# EAGLE board eib-64-large_panel (EAGLE 8.3.2), part 1 of 3
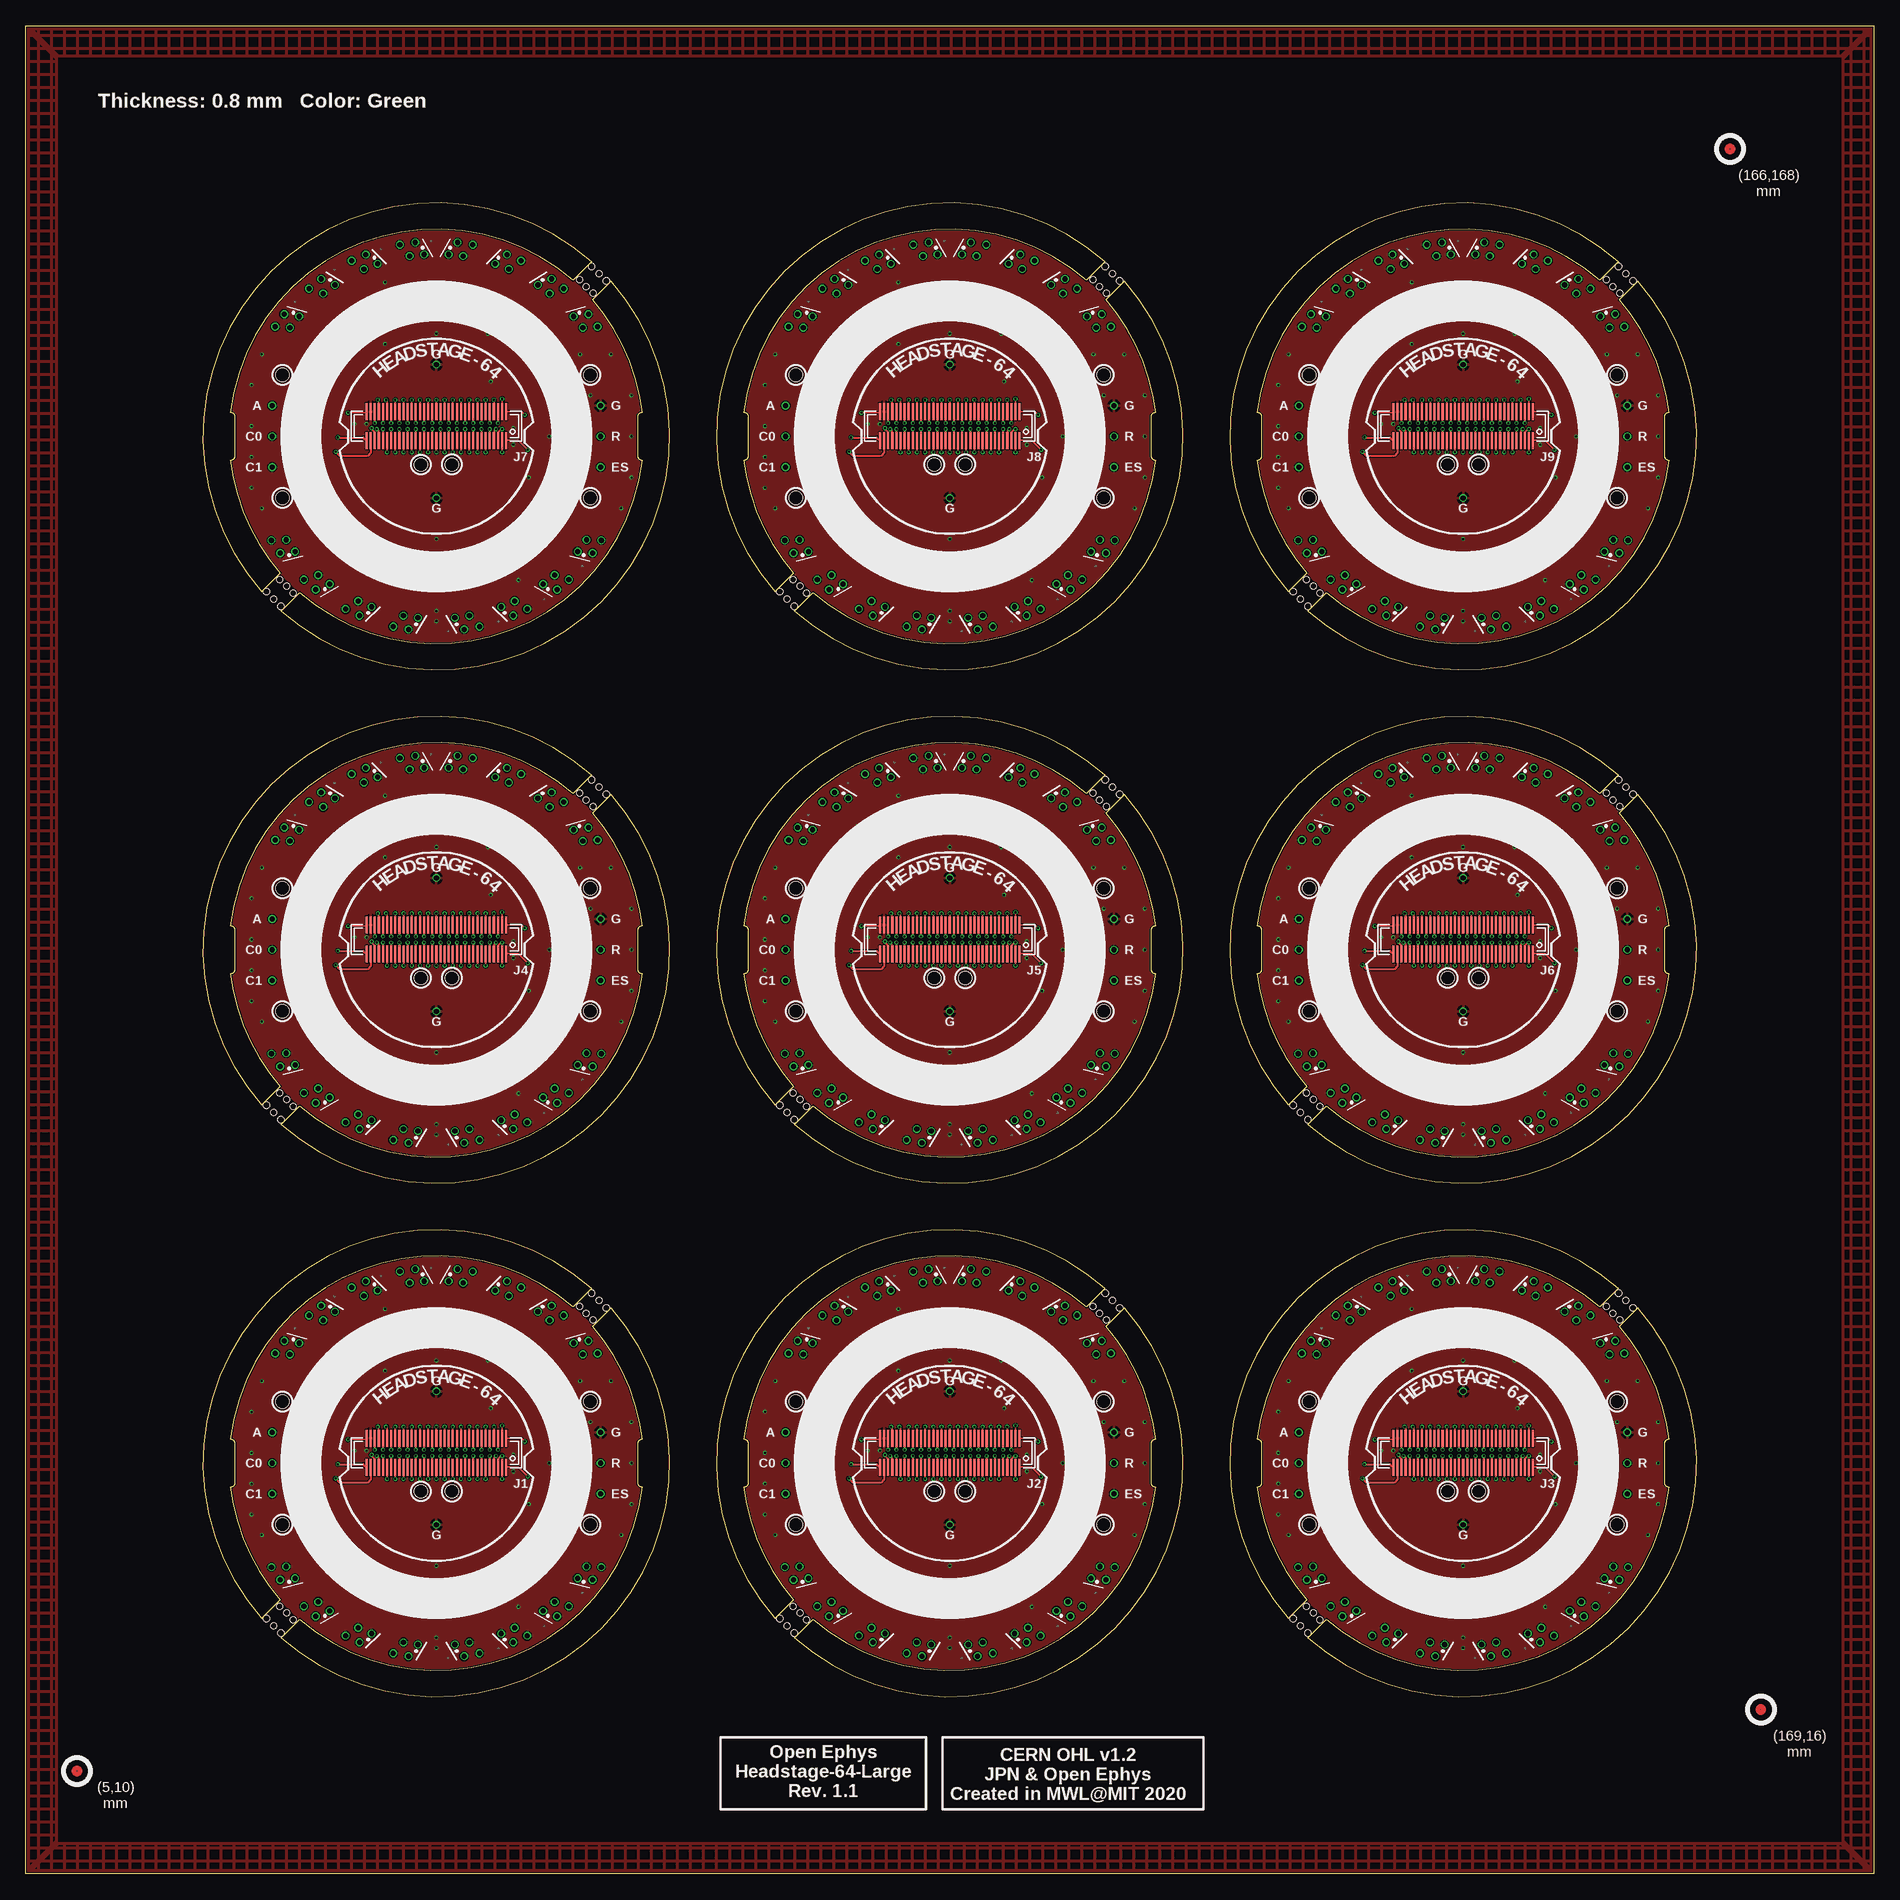
[diagram p0: board, top side]
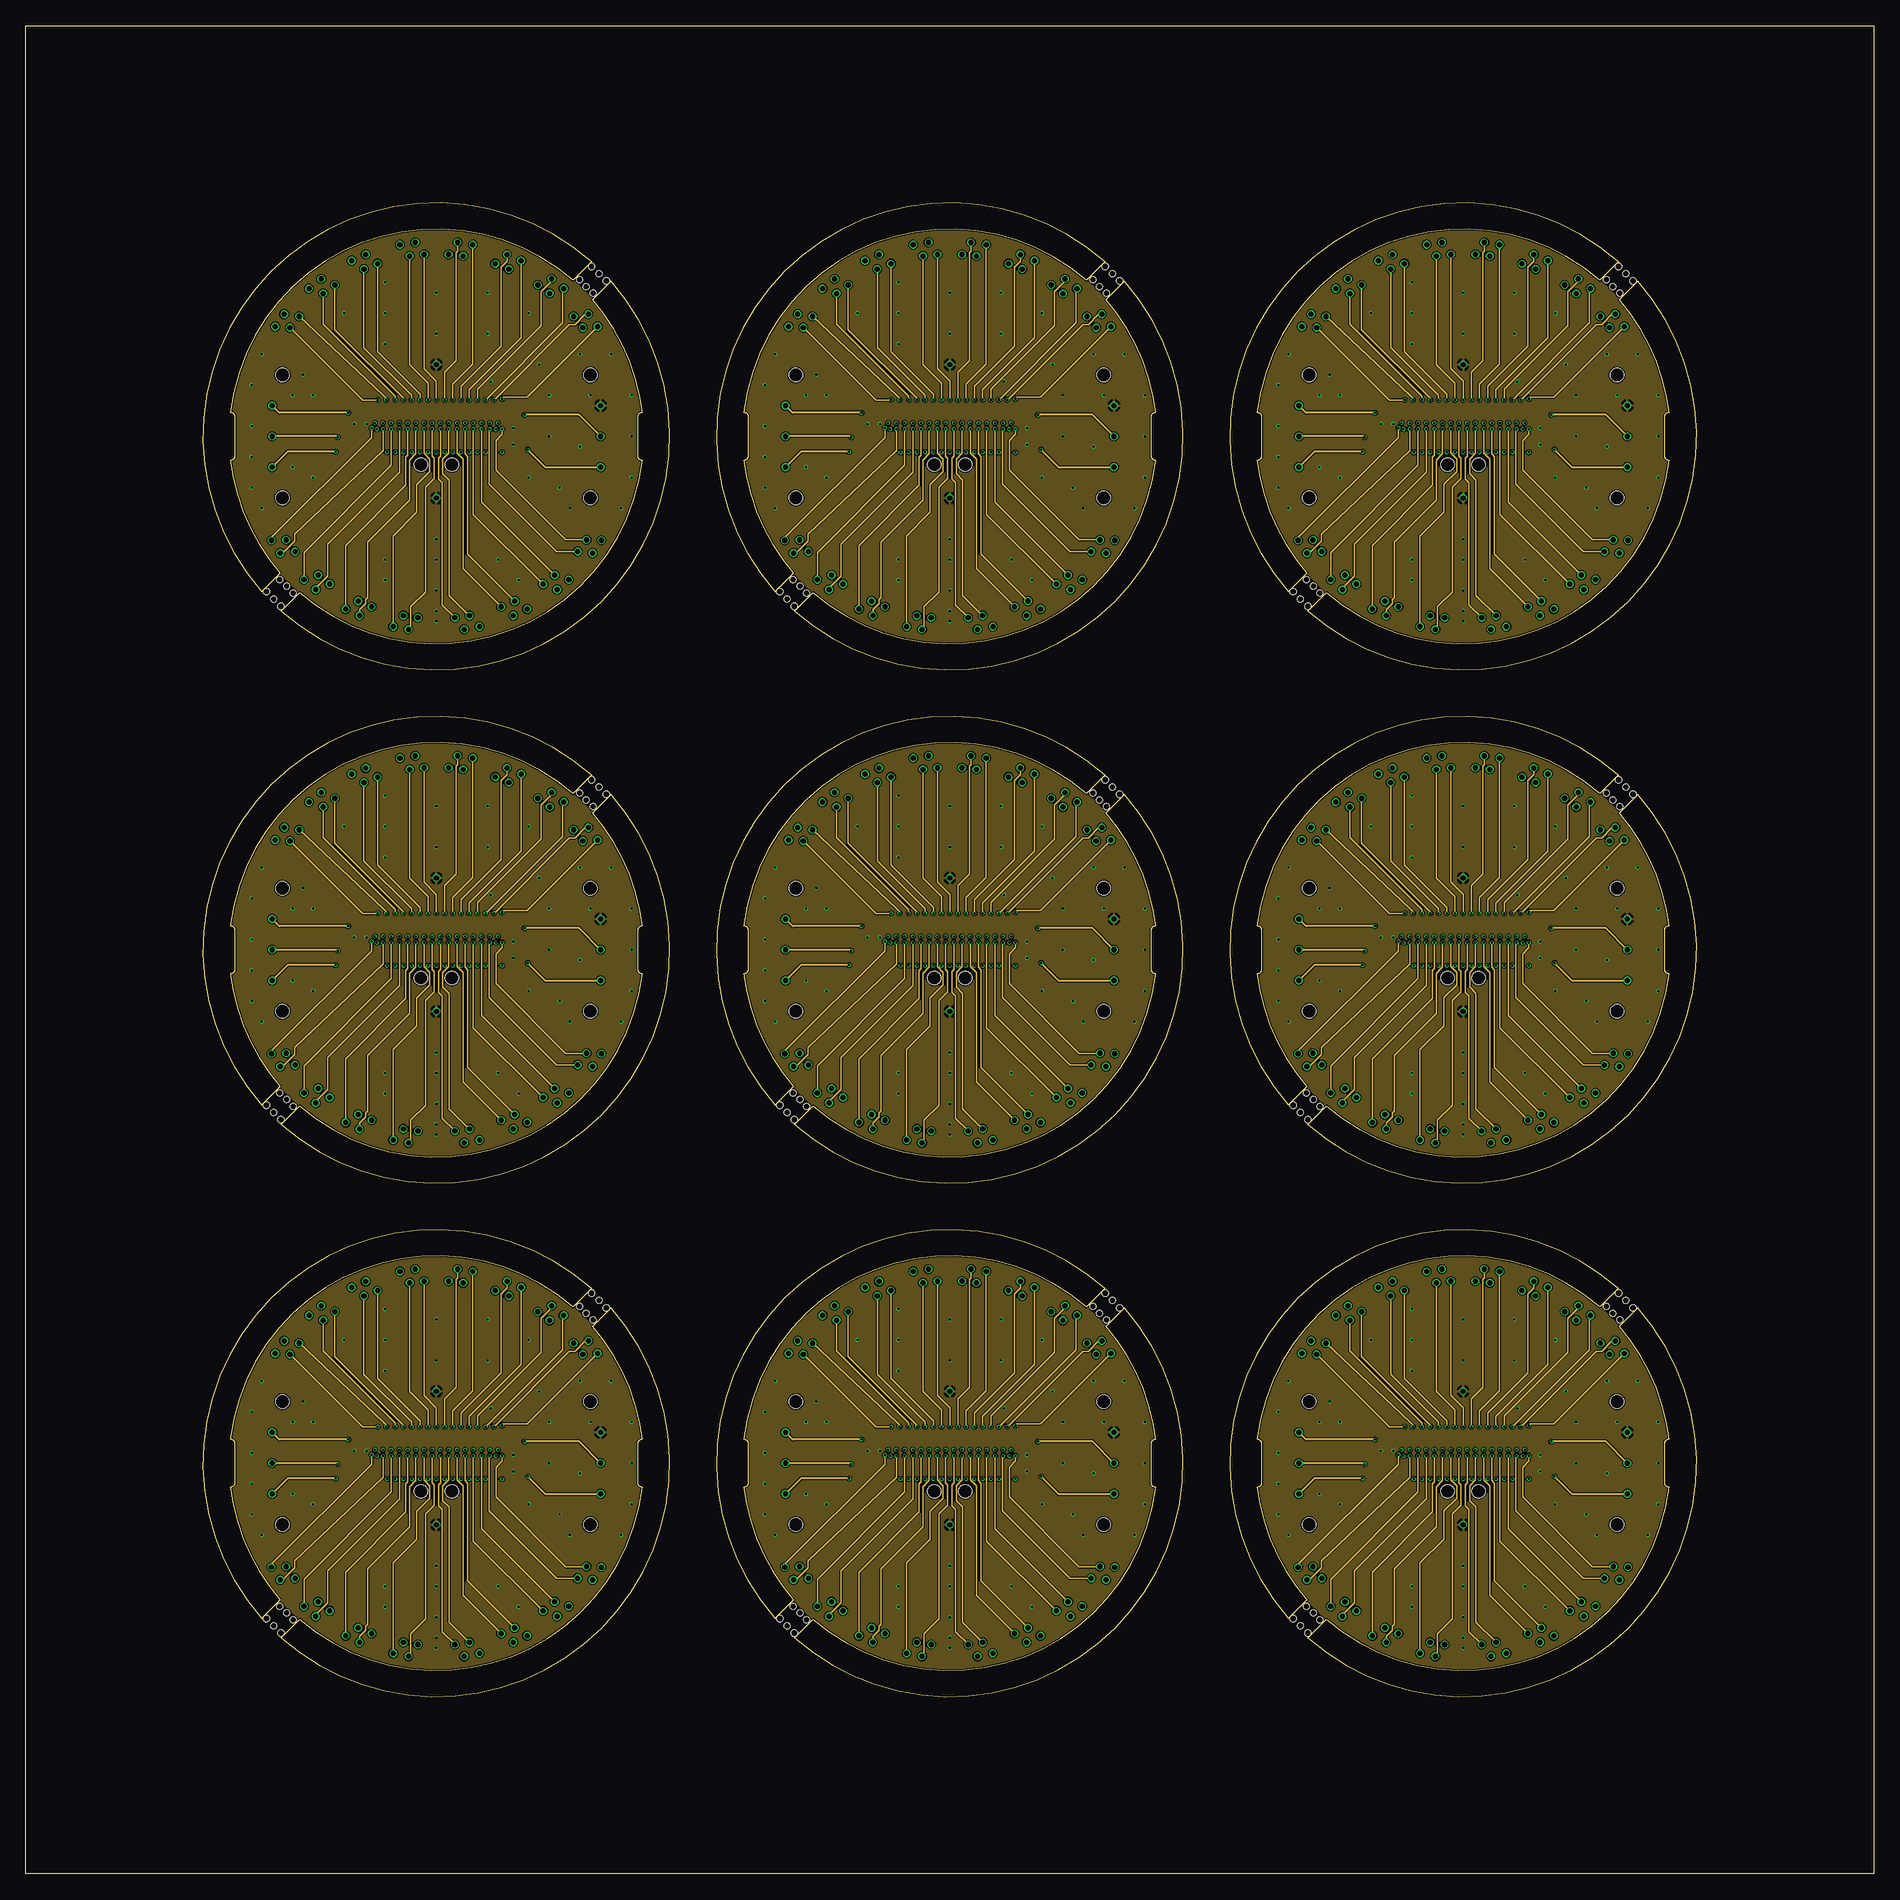
[diagram p1: board, inner layer Route2]
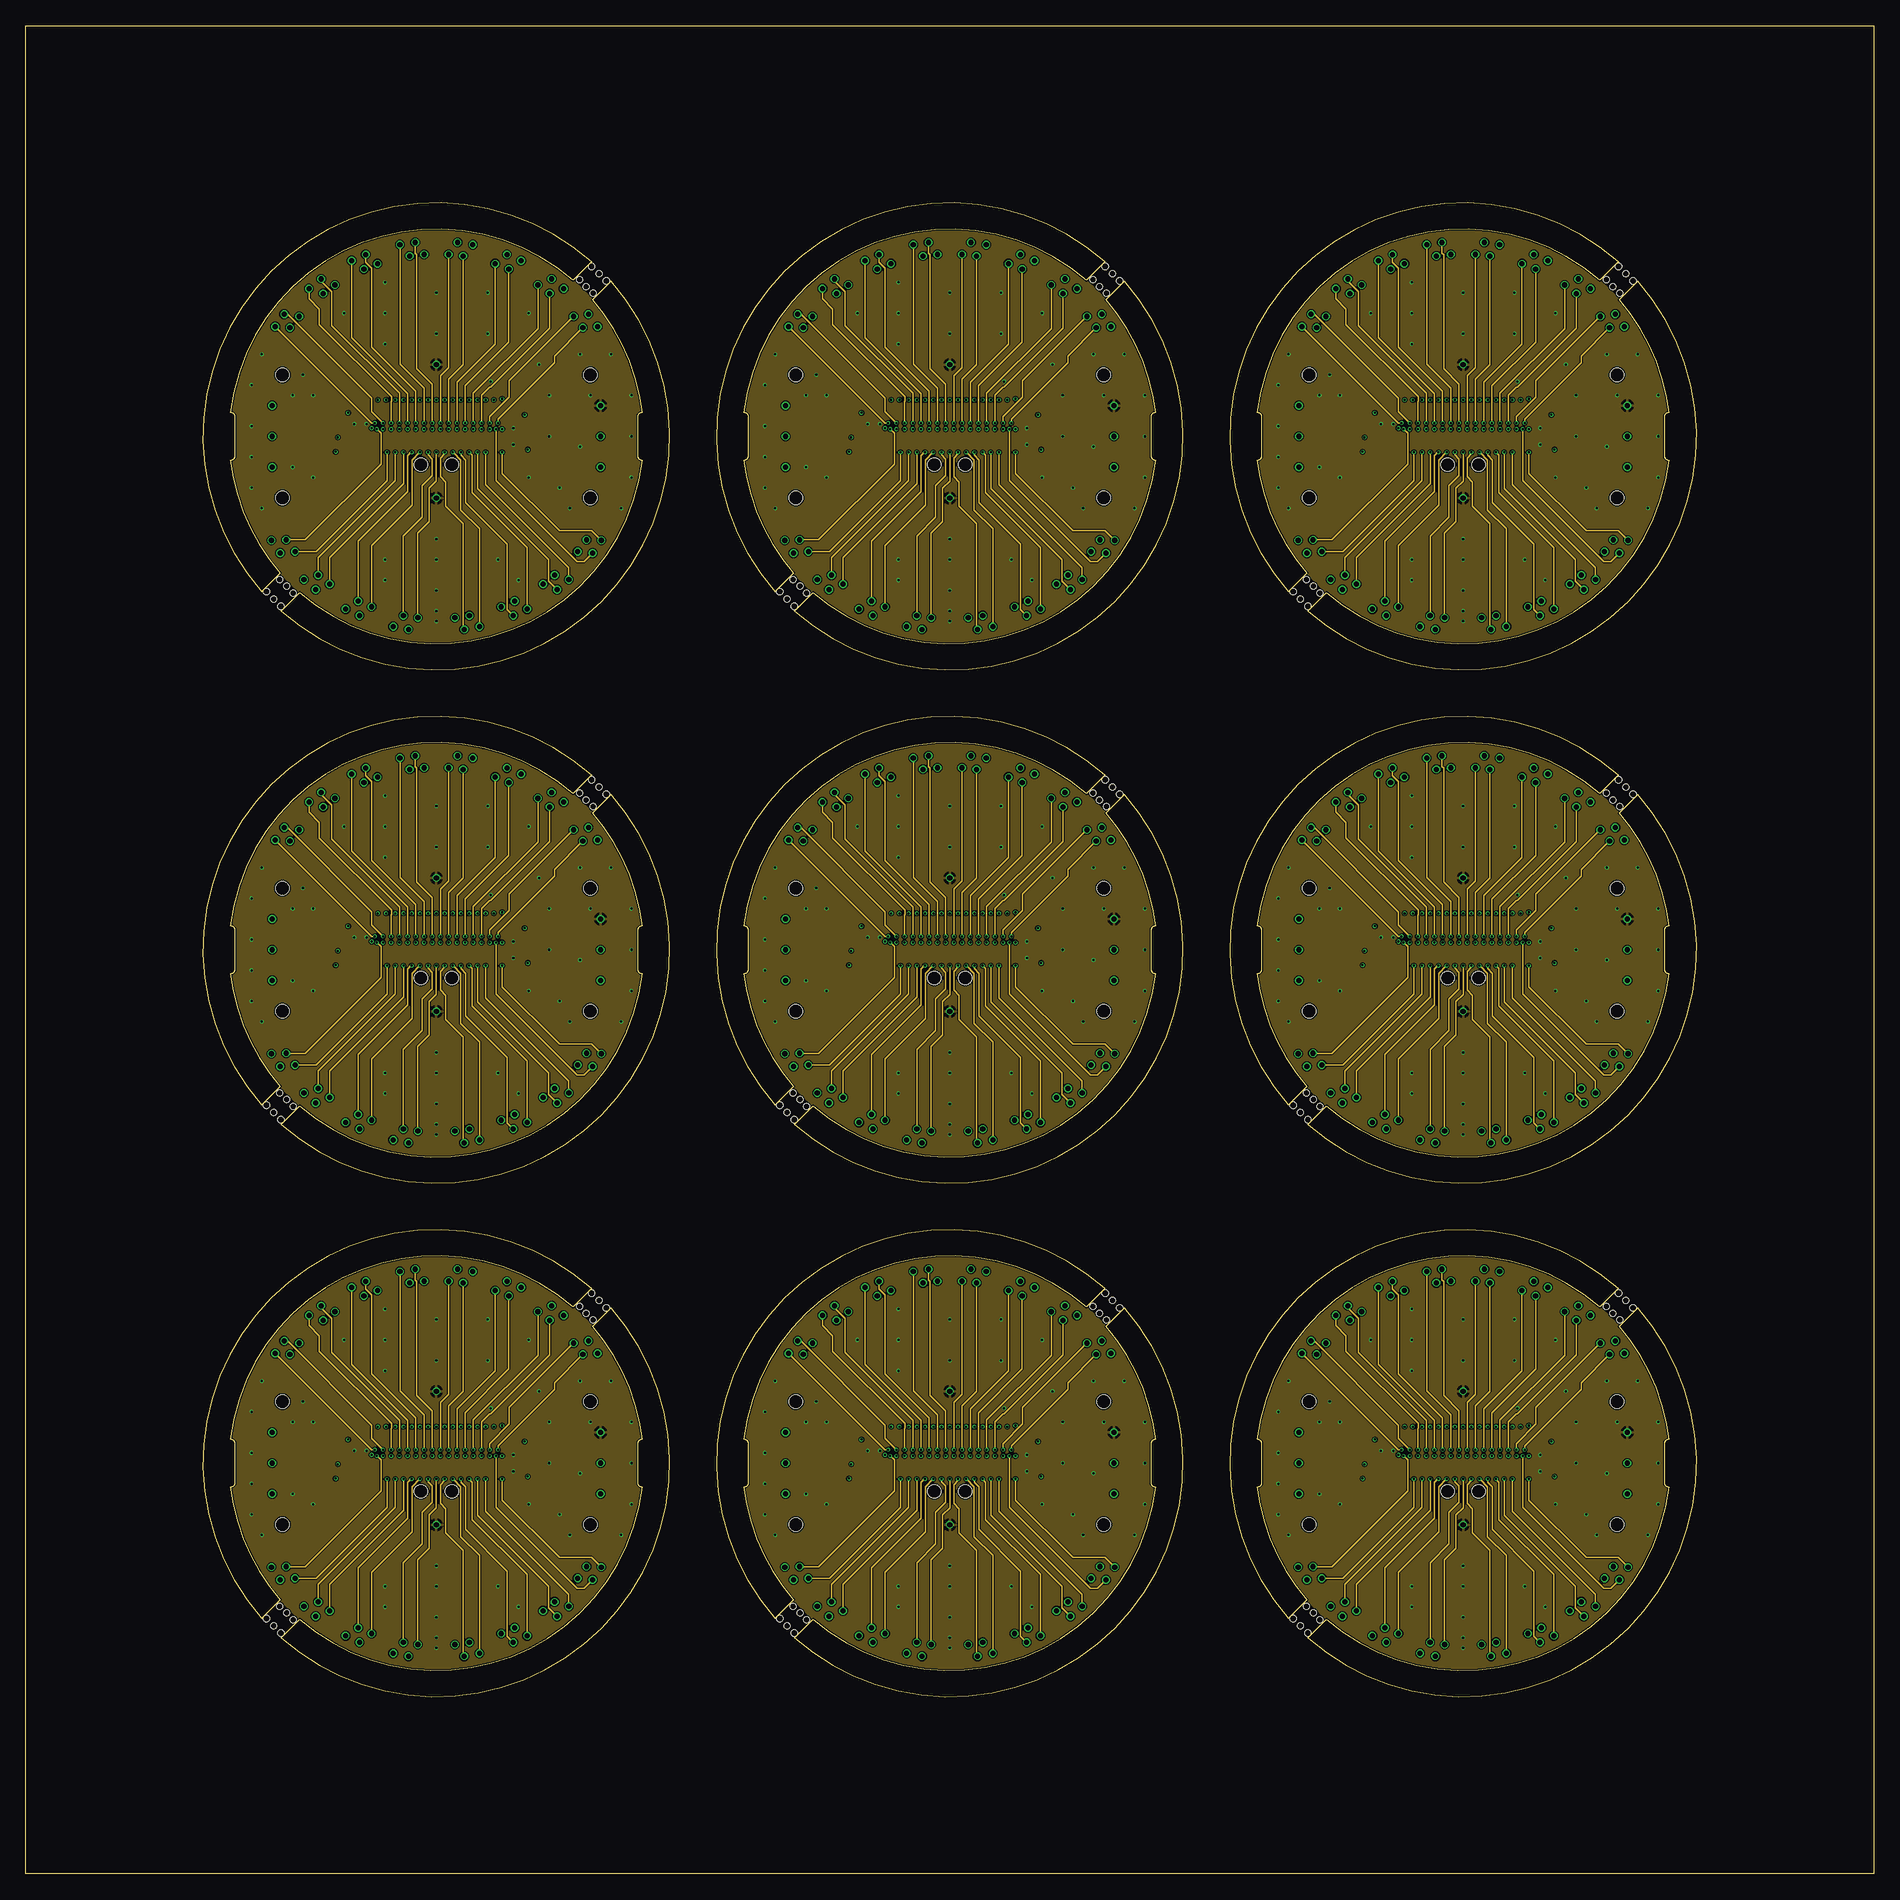
[diagram p2: board, inner layer Route15]
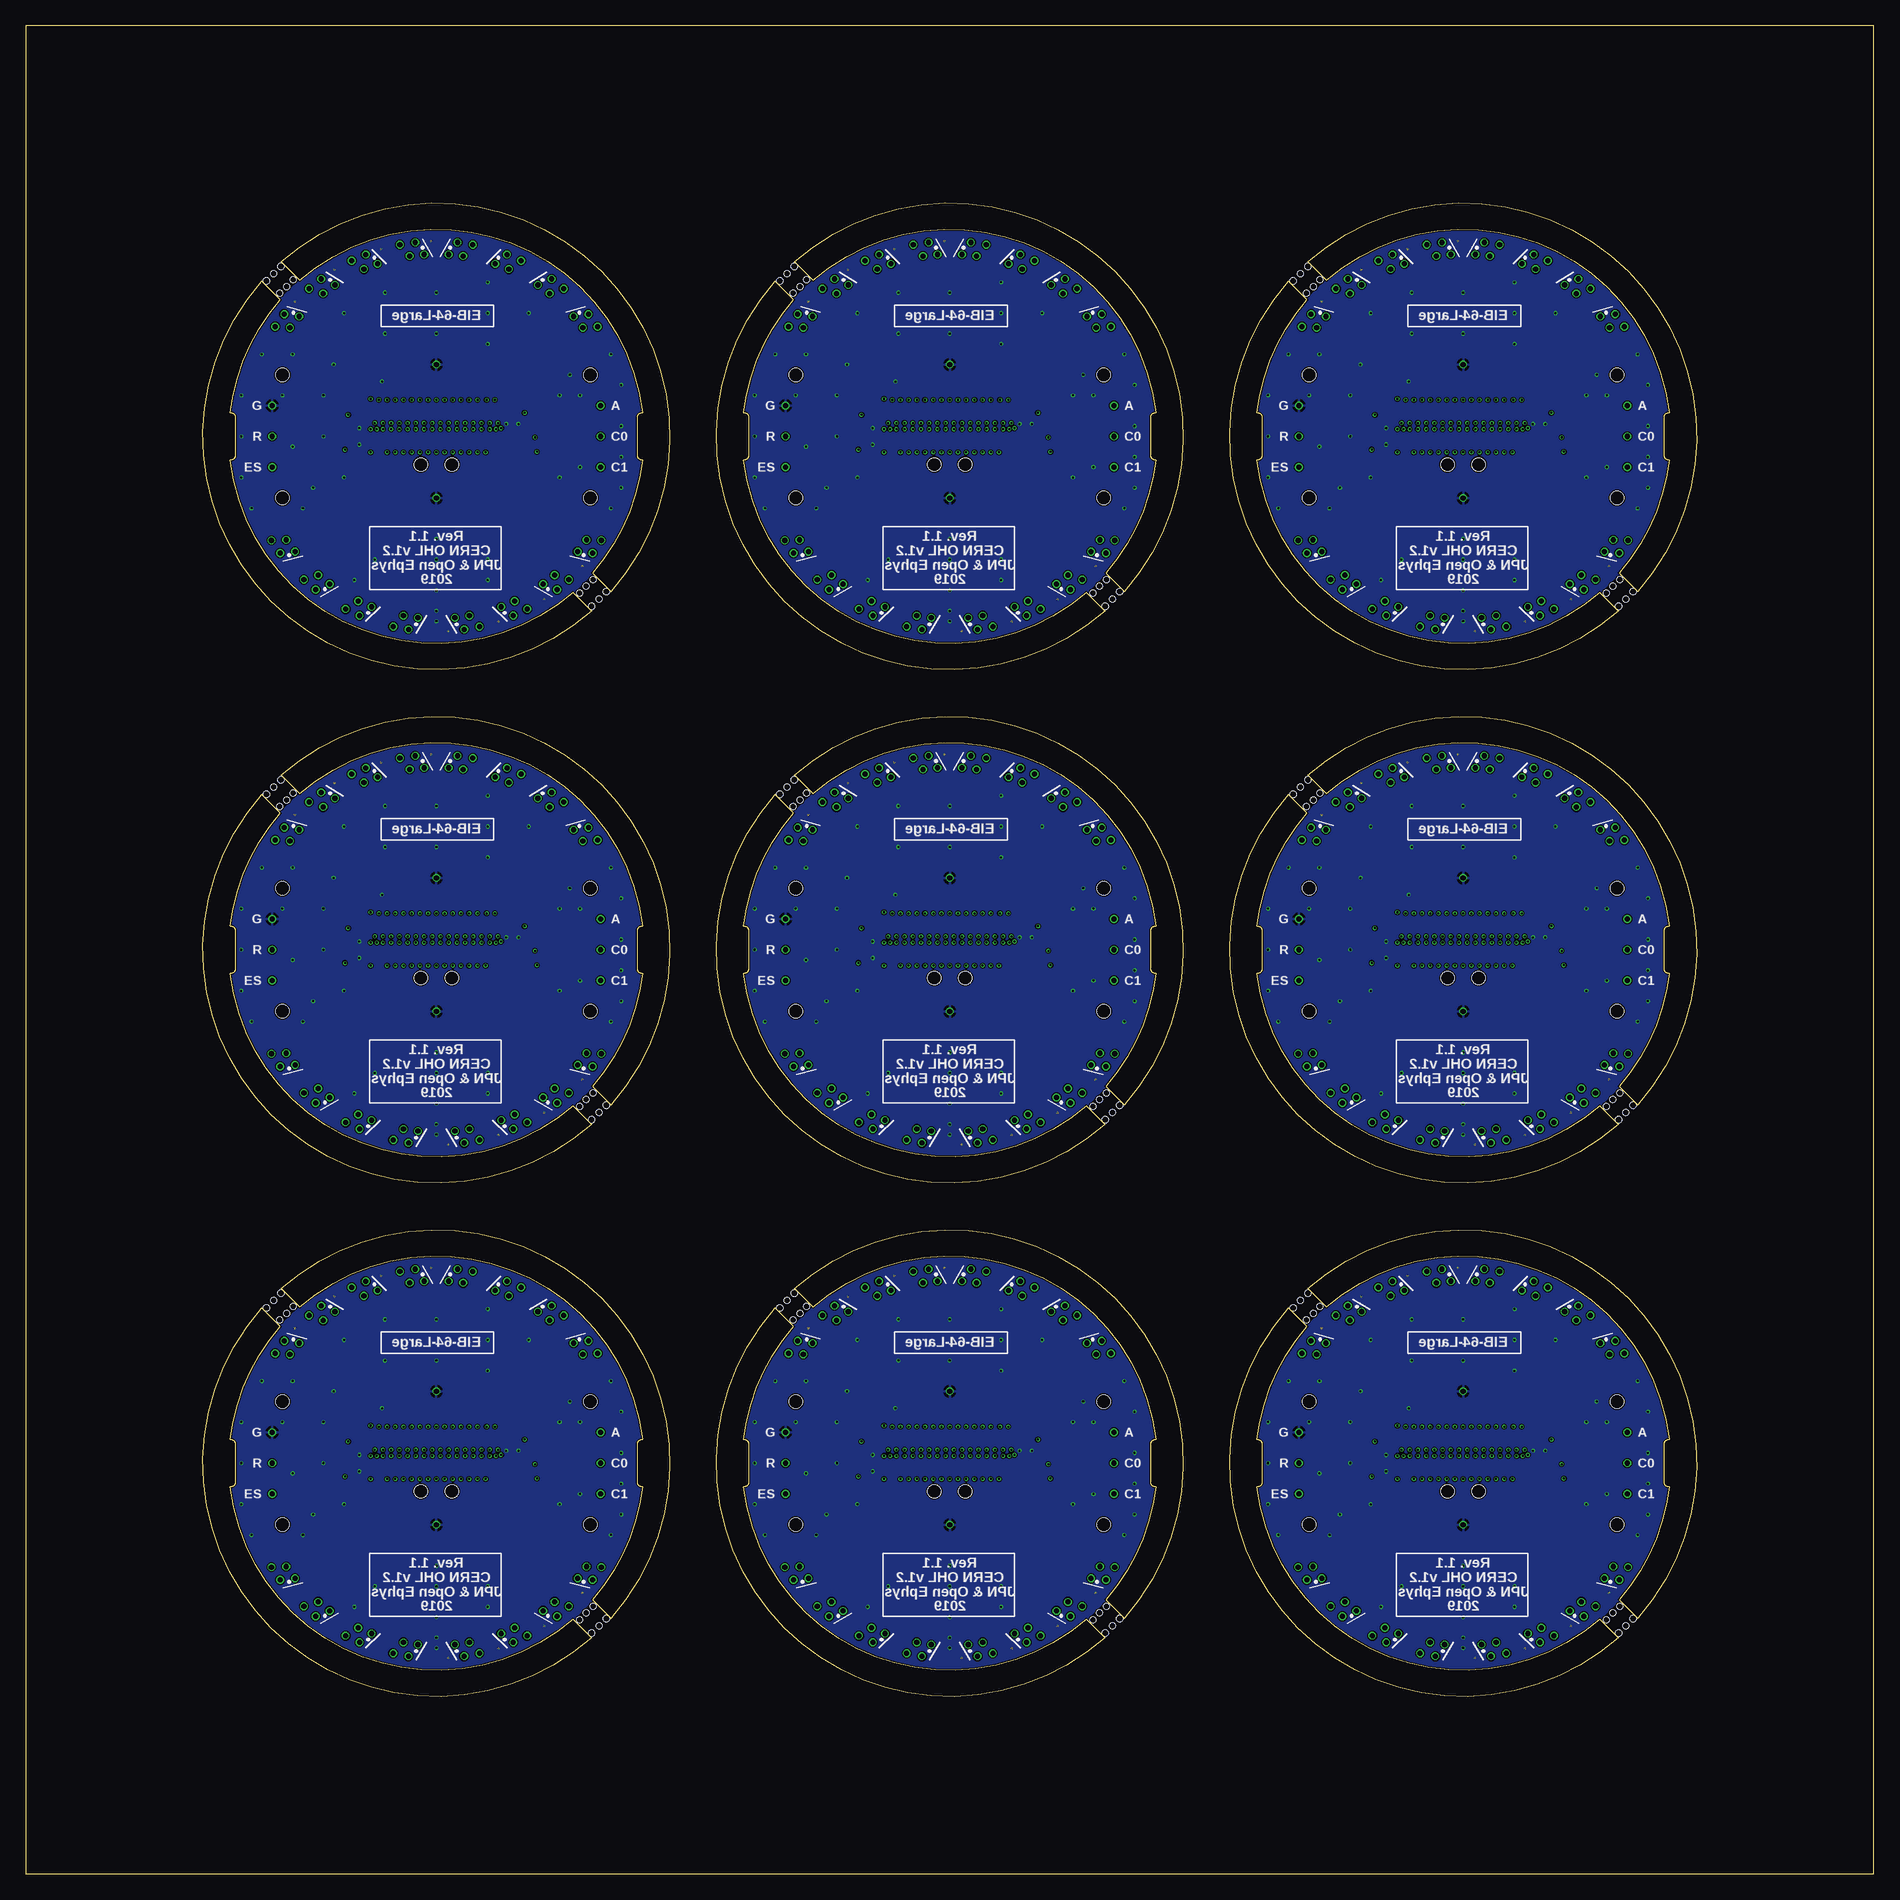
[diagram p3: board, bottom side, seen from below]

Size 180 x 180 mm. Coordinates in mm from the lower left corner, seen from the top.
Outline: 319 segments
Copper layers (1+2*15+16): Top 0.035mm / dielectric 1.5mm / Route2 0.035mm / dielectric 0.15mm / Route15 0.035mm / dielectric 0.2mm / Bottom 0.035mm
Design rules "pcb-cart-standard-4-layer *": minimum track width 3mil, minimum drill 6mil, track to track 4mil, track to pad 4mil, pad to pad 4mil, via to via 4mil, smd to smd 4mil, copper to edge 6mil, drill to drill 6mil, minimum pad ring 3mil, minimum via ring 3mil, stop-mask expansion 2mil, vias tented up to drill 20mil, thermal gap 10mil
Holes 1.3 mm at 38.5,37.25 41.5,37.25 25,46 25,34 55,34 55,46 88.5,37.25 91.5,37.25 75,46 75,34 105,34 105,46 138.5,37.25 141.5,37.25 125,46 125,34 155,34 155,46 38.5,87.25 41.5,87.25 25,96 25,84 55,84 55,96 88.5,87.25 91.5,87.25 75,96 75,84 105,84 105,96 138.5,87.25 141.5,87.25 125,96 125,84 155,84 155,96 38.5,137.25 41.5,137.25 25,146 25,134 55,134 55,146 88.5,137.25 91.5,137.25 75,146 75,134 105,134 105,146 138.5,137.25 141.5,137.25 125,146 125,134 155,134 155,146
Holes 0.6 mm at 24.87,23.45 24.16,24.16 23.45,24.87 26.05,24.74 25.41,25.41 24.74,26.05 55.13,56.55 55.84,55.84 56.55,55.13 53.95,55.26 54.59,54.59 55.26,53.95 74.87,23.45 74.16,24.16 73.45,24.87 76.05,24.74 75.41,25.41 74.74,26.05 105.13,56.55 105.84,55.84 106.55,55.13 103.95,55.26 104.59,54.59 105.26,53.95 124.87,23.45 124.16,24.16 123.45,24.87 126.05,24.74 125.41,25.41 124.74,26.05 155.13,56.55 155.84,55.84 156.55,55.13 153.95,55.26 154.59,54.59 155.26,53.95 24.87,73.45 24.16,74.16 23.45,74.87 26.05,74.74 25.41,75.41 24.74,76.05 55.13,106.55 55.84,105.84 56.55,105.13 53.95,105.26 54.59,104.59 55.26,103.95 74.87,73.45 74.16,74.16 73.45,74.87 76.05,74.74 75.41,75.41 74.74,76.05 105.13,106.55 105.84,105.84 106.55,105.13 103.95,105.26 104.59,104.59 105.26,103.95 124.87,73.45 124.16,74.16 123.45,74.87 126.05,74.74 125.41,75.41 124.74,76.05 155.13,106.55 155.84,105.84 156.55,105.13 153.95,105.26 154.59,104.59 155.26,103.95 24.87,123.45 24.16,124.16 23.45,124.87 26.05,124.74 25.41,125.41 24.74,126.05 55.13,156.55 55.84,155.84 56.55,155.13 53.95,155.26 54.59,154.59 55.26,153.95 74.87,123.45 74.16,124.16 73.45,124.87 76.05,124.74 75.41,125.41 74.74,126.05 105.13,156.55 105.84,155.84 106.55,155.13 103.95,155.26 104.59,154.59 105.26,153.95 124.87,123.45 124.16,124.16 123.45,124.87 126.05,124.74 125.41,125.41 124.74,126.05 155.13,156.55 155.84,155.84 156.55,155.13 153.95,155.26 154.59,154.59 155.26,153.95

## Footprints (pad centres in the part's own frame; a part is rotated, then mirrored left to right if it is on the bottom)
GOLDPIN_0.5ID_0.7OD = drill 0.5 pad 0.7: P$1 0,0
DDF40-70REC-LRG = smd 0.2 x 1.64: 1 -6.8,1.42; 2 -6.4,1.42; 3 -6,1.42; 4 -5.6,1.42; 5 -5.2,1.42; 6 -4.8,1.42; 7 -4.4,1.42; 8 -4,1.42; 9 -3.6,1.42; 10 -3.2,1.42; 11 -2.8,1.42; 12 -2.4,1.42; 13 -2,1.42; 14 -1.6,1.42; 15 -1.2,1.42; 16 -0.8,1.42; 17 -0.4,1.42; 18 0,1.42; 19 0.4,1.42; 20 0.8,1.42; 21 1.2,1.42; 22 1.6,1.42; 23 2,1.42; 24 2.4,1.42; 25 2.8,1.42; 26 3.2,1.42; 27 3.6,1.42; 28 4,1.42; 29 4.4,1.42; 30 4.8,1.42; 31 5.2,1.42; 32 5.6,1.42; 33 6,1.42; 34 6.4,1.42; 35 6.8,1.42; 36 6.8,-1.42; 37 6.4,-1.42; 38 6,-1.42; 39 5.6,-1.42; 40 5.2,-1.42; 41 4.8,-1.42; 42 4.4,-1.42; 43 4,-1.42; 44 3.6,-1.42; 45 3.2,-1.42; 46 2.8,-1.42; 47 2.4,-1.42; 48 2,-1.42; 49 1.6,-1.42; 50 1.2,-1.42; 51 0.8,-1.42; 52 0.4,-1.42; 53 0,-1.42; 54 -0.4,-1.42; 55 -0.8,-1.42; 56 -1.2,-1.42; 57 -1.6,-1.42; 58 -2,-1.42; 59 -2.4,-1.42; 60 -2.8,-1.42; 61 -3.2,-1.42; 62 -3.6,-1.42; 63 -4,-1.42; 64 -4.4,-1.42; 65 -4.8,-1.42; 66 -5.2,-1.42; 67 -5.6,-1.42; 68 -6,-1.42; 69 -6.4,-1.42; 70 -6.8,-1.42
TETRODE_128_0.5ID_0.7OD = drill 0.5 pad 0.703: 0 0.724,17.743; 1 1.562,18.934; 2 2.14,17.628; 3 3.058,18.748

## Placement (x,y rotation side)
AN  LRG_GP  [GOLDPIN_0.5ID_0.7OD]  24,43 0 top
AN1  LRG_GP  [GOLDPIN_0.5ID_0.7OD]  74,43 0 top
AN2  LRG_GP  [GOLDPIN_0.5ID_0.7OD]  124,43 0 top
AN3  LRG_GP  [GOLDPIN_0.5ID_0.7OD]  24,93 0 top
AN4  LRG_GP  [GOLDPIN_0.5ID_0.7OD]  74,93 0 top
AN5  LRG_GP  [GOLDPIN_0.5ID_0.7OD]  124,93 0 top
AN6  LRG_GP  [GOLDPIN_0.5ID_0.7OD]  24,143 0 top
AN7  LRG_GP  [GOLDPIN_0.5ID_0.7OD]  74,143 0 top
AN8  LRG_GP  [GOLDPIN_0.5ID_0.7OD]  124,143 0 top
CAT0  LRG_GP  [GOLDPIN_0.5ID_0.7OD]  24,37 0 top
CAT1  LRG_GP  [GOLDPIN_0.5ID_0.7OD]  24,40 0 top
CAT2  LRG_GP  [GOLDPIN_0.5ID_0.7OD]  74,37 0 top
CAT3  LRG_GP  [GOLDPIN_0.5ID_0.7OD]  74,40 0 top
CAT4  LRG_GP  [GOLDPIN_0.5ID_0.7OD]  124,37 0 top
CAT5  LRG_GP  [GOLDPIN_0.5ID_0.7OD]  124,40 0 top
CAT6  LRG_GP  [GOLDPIN_0.5ID_0.7OD]  24,87 0 top
CAT7  LRG_GP  [GOLDPIN_0.5ID_0.7OD]  24,90 0 top
CAT8  LRG_GP  [GOLDPIN_0.5ID_0.7OD]  74,87 0 top
CAT9  LRG_GP  [GOLDPIN_0.5ID_0.7OD]  74,90 0 top
CAT10  LRG_GP  [GOLDPIN_0.5ID_0.7OD]  124,87 0 top
CAT11  LRG_GP  [GOLDPIN_0.5ID_0.7OD]  124,90 0 top
CAT12  LRG_GP  [GOLDPIN_0.5ID_0.7OD]  24,137 0 top
CAT13  LRG_GP  [GOLDPIN_0.5ID_0.7OD]  24,140 0 top
CAT14  LRG_GP  [GOLDPIN_0.5ID_0.7OD]  74,137 0 top
CAT15  LRG_GP  [GOLDPIN_0.5ID_0.7OD]  74,140 0 top
CAT16  LRG_GP  [GOLDPIN_0.5ID_0.7OD]  124,137 0 top
CAT17  LRG_GP  [GOLDPIN_0.5ID_0.7OD]  124,140 0 top
E$1  [FIDUCIAL]  5,10 0 top
E$2  [FIDUCIAL]  169,16 0 top
E$3  [FIDUCIAL]  166,168 0 top
ESTIM  LRG_GP  [GOLDPIN_0.5ID_0.7OD]  56,37 0 top
ESTIM1  LRG_GP  [GOLDPIN_0.5ID_0.7OD]  106,37 0 top
ESTIM2  LRG_GP  [GOLDPIN_0.5ID_0.7OD]  156,37 0 top
ESTIM3  LRG_GP  [GOLDPIN_0.5ID_0.7OD]  56,87 0 top
ESTIM4  LRG_GP  [GOLDPIN_0.5ID_0.7OD]  106,87 0 top
ESTIM5  LRG_GP  [GOLDPIN_0.5ID_0.7OD]  156,87 0 top
ESTIM6  LRG_GP  [GOLDPIN_0.5ID_0.7OD]  56,137 0 top
ESTIM7  LRG_GP  [GOLDPIN_0.5ID_0.7OD]  106,137 0 top
ESTIM8  LRG_GP  [GOLDPIN_0.5ID_0.7OD]  156,137 0 top
GND0  LRG_GP  [GOLDPIN_0.5ID_0.7OD]  40,47 0 top
GND1  LRG_GP  [GOLDPIN_0.5ID_0.7OD]  40,34 0 top
GND2  LRG_GP  [GOLDPIN_0.5ID_0.7OD]  90,47 0 top
GND3  LRG_GP  [GOLDPIN_0.5ID_0.7OD]  90,34 0 top
GND4  LRG_GP  [GOLDPIN_0.5ID_0.7OD]  140,47 0 top
GND5  LRG_GP  [GOLDPIN_0.5ID_0.7OD]  140,34 0 top
GND6  LRG_GP  [GOLDPIN_0.5ID_0.7OD]  40,97 0 top
GND7  LRG_GP  [GOLDPIN_0.5ID_0.7OD]  40,84 0 top
GND8  LRG_GP  [GOLDPIN_0.5ID_0.7OD]  90,97 0 top
GND9  LRG_GP  [GOLDPIN_0.5ID_0.7OD]  90,84 0 top
GND10  LRG_GP  [GOLDPIN_0.5ID_0.7OD]  140,97 0 top
GND11  LRG_GP  [GOLDPIN_0.5ID_0.7OD]  140,84 0 top
GND12  LRG_GP  [GOLDPIN_0.5ID_0.7OD]  40,147 0 top
GND13  LRG_GP  [GOLDPIN_0.5ID_0.7OD]  40,134 0 top
GND14  LRG_GP  [GOLDPIN_0.5ID_0.7OD]  90,147 0 top
GND15  LRG_GP  [GOLDPIN_0.5ID_0.7OD]  90,134 0 top
GND16  LRG_GP  [GOLDPIN_0.5ID_0.7OD]  140,147 0 top
GND17  LRG_GP  [GOLDPIN_0.5ID_0.7OD]  140,134 0 top
J1  DF40-REC  [DDF40-70REC-LRG]  40,41 180 top
J2  DF40-REC  [DDF40-70REC-LRG]  90,41 180 top
J3  DF40-REC  [DDF40-70REC-LRG]  140,41 180 top
J4  DF40-REC  [DDF40-70REC-LRG]  40,91 180 top
J5  DF40-REC  [DDF40-70REC-LRG]  90,91 180 top
J6  DF40-REC  [DDF40-70REC-LRG]  140,91 180 top
J7  DF40-REC  [DDF40-70REC-LRG]  40,141 180 top
J8  DF40-REC  [DDF40-70REC-LRG]  90,141 180 top
J9  DF40-REC  [DDF40-70REC-LRG]  140,141 180 top
REF  LRG_GP  [GOLDPIN_0.5ID_0.7OD]  56,40 0 top
REF1  LRG_GP  [GOLDPIN_0.5ID_0.7OD]  106,40 0 top
REF2  LRG_GP  [GOLDPIN_0.5ID_0.7OD]  156,40 0 top
REF3  LRG_GP  [GOLDPIN_0.5ID_0.7OD]  56,90 0 top
REF4  LRG_GP  [GOLDPIN_0.5ID_0.7OD]  106,90 0 top
REF5  LRG_GP  [GOLDPIN_0.5ID_0.7OD]  156,90 0 top
REF6  LRG_GP  [GOLDPIN_0.5ID_0.7OD]  56,140 0 top
REF7  LRG_GP  [GOLDPIN_0.5ID_0.7OD]  106,140 0 top
REF8  LRG_GP  [GOLDPIN_0.5ID_0.7OD]  156,140 0 top
SHLD_A  LRG_GP  [GOLDPIN_0.5ID_0.7OD]  56,43 0 top
SHLD_A1  LRG_GP  [GOLDPIN_0.5ID_0.7OD]  106,43 0 top
SHLD_A2  LRG_GP  [GOLDPIN_0.5ID_0.7OD]  156,43 0 top
SHLD_A3  LRG_GP  [GOLDPIN_0.5ID_0.7OD]  56,93 0 top
SHLD_A4  LRG_GP  [GOLDPIN_0.5ID_0.7OD]  106,93 0 top
SHLD_A5  LRG_GP  [GOLDPIN_0.5ID_0.7OD]  156,93 0 top
SHLD_A6  LRG_GP  [GOLDPIN_0.5ID_0.7OD]  56,143 0 top
SHLD_A7  LRG_GP  [GOLDPIN_0.5ID_0.7OD]  106,143 0 top
SHLD_A8  LRG_GP  [GOLDPIN_0.5ID_0.7OD]  156,143 0 top
TET0  0  [TETRODE_128_0.5ID_0.7OD]  40,40 358.5 bottom
TET1  1  [TETRODE_128_0.5ID_0.7OD]  40,40 343.5 bottom
TET2  2  [TETRODE_128_0.5ID_0.7OD]  40,40 328.5 bottom
TET3  0  [TETRODE_128_0.5ID_0.7OD]  90,40 358.5 bottom
TET4  4  [TETRODE_128_0.5ID_0.7OD]  40,40 131.5 top
TET5  5  [TETRODE_128_0.5ID_0.7OD]  40,40 146.5 top
TET6  6  [TETRODE_128_0.5ID_0.7OD]  40,40 161.5 top
TET7  7  [TETRODE_128_0.5ID_0.7OD]  40,40 176.5 top
TET8  8  [TETRODE_128_0.5ID_0.7OD]  40,40 176.5 bottom
TET9  9  [TETRODE_128_0.5ID_0.7OD]  40,40 161.5 bottom
TET10  10  [TETRODE_128_0.5ID_0.7OD]  40,40 146.5 bottom
TET11  11  [TETRODE_128_0.5ID_0.7OD]  40,40 131.5 bottom
TET12  1  [TETRODE_128_0.5ID_0.7OD]  90,40 343.5 bottom
TET13  13  [TETRODE_128_0.5ID_0.7OD]  40,40 328.5 top
TET14  14  [TETRODE_128_0.5ID_0.7OD]  40,40 343.5 top
TET15  15  [TETRODE_128_0.5ID_0.7OD]  40,40 358.5 top
TET16  12  [TETRODE_128_0.5ID_0.7OD]  40,40 313.5 top
TET17  3  [TETRODE_128_0.5ID_0.7OD]  40,40 313.5 bottom
TET18  2  [TETRODE_128_0.5ID_0.7OD]  90,40 328.5 bottom
TET19  4  [TETRODE_128_0.5ID_0.7OD]  90,40 131.5 top
TET20  5  [TETRODE_128_0.5ID_0.7OD]  90,40 146.5 top
TET21  6  [TETRODE_128_0.5ID_0.7OD]  90,40 161.5 top
TET22  7  [TETRODE_128_0.5ID_0.7OD]  90,40 176.5 top
TET23  15  [TETRODE_128_0.5ID_0.7OD]  90,40 358.5 top
TET24  14  [TETRODE_128_0.5ID_0.7OD]  90,40 343.5 top
TET25  13  [TETRODE_128_0.5ID_0.7OD]  90,40 328.5 top
TET26  11  [TETRODE_128_0.5ID_0.7OD]  90,40 131.5 bottom
TET27  10  [TETRODE_128_0.5ID_0.7OD]  90,40 146.5 bottom
TET28  9  [TETRODE_128_0.5ID_0.7OD]  90,40 161.5 bottom
TET29  8  [TETRODE_128_0.5ID_0.7OD]  90,40 176.5 bottom
TET30  12  [TETRODE_128_0.5ID_0.7OD]  90,40 313.5 top
TET31  3  [TETRODE_128_0.5ID_0.7OD]  90,40 313.5 bottom
TET32  0  [TETRODE_128_0.5ID_0.7OD]  140,40 358.5 bottom
TET33  1  [TETRODE_128_0.5ID_0.7OD]  140,40 343.5 bottom
TET34  2  [TETRODE_128_0.5ID_0.7OD]  140,40 328.5 bottom
TET35  4  [TETRODE_128_0.5ID_0.7OD]  140,40 131.5 top
TET36  5  [TETRODE_128_0.5ID_0.7OD]  140,40 146.5 top
TET37  6  [TETRODE_128_0.5ID_0.7OD]  140,40 161.5 top
TET38  7  [TETRODE_128_0.5ID_0.7OD]  140,40 176.5 top
TET39  15  [TETRODE_128_0.5ID_0.7OD]  140,40 358.5 top
TET40  14  [TETRODE_128_0.5ID_0.7OD]  140,40 343.5 top
TET41  13  [TETRODE_128_0.5ID_0.7OD]  140,40 328.5 top
TET42  11  [TETRODE_128_0.5ID_0.7OD]  140,40 131.5 bottom
TET43  10  [TETRODE_128_0.5ID_0.7OD]  140,40 146.5 bottom
TET44  9  [TETRODE_128_0.5ID_0.7OD]  140,40 161.5 bottom
TET45  8  [TETRODE_128_0.5ID_0.7OD]  140,40 176.5 bottom
TET46  12  [TETRODE_128_0.5ID_0.7OD]  140,40 313.5 top
TET47  3  [TETRODE_128_0.5ID_0.7OD]  140,40 313.5 bottom
TET48  0  [TETRODE_128_0.5ID_0.7OD]  40,90 358.5 bottom
TET49  1  [TETRODE_128_0.5ID_0.7OD]  40,90 343.5 bottom
TET50  2  [TETRODE_128_0.5ID_0.7OD]  40,90 328.5 bottom
TET51  4  [TETRODE_128_0.5ID_0.7OD]  40,90 131.5 top
TET52  5  [TETRODE_128_0.5ID_0.7OD]  40,90 146.5 top
TET53  6  [TETRODE_128_0.5ID_0.7OD]  40,90 161.5 top
TET54  7  [TETRODE_128_0.5ID_0.7OD]  40,90 176.5 top
TET55  15  [TETRODE_128_0.5ID_0.7OD]  40,90 358.5 top
TET56  14  [TETRODE_128_0.5ID_0.7OD]  40,90 343.5 top
TET57  13  [TETRODE_128_0.5ID_0.7OD]  40,90 328.5 top
TET58  11  [TETRODE_128_0.5ID_0.7OD]  40,90 131.5 bottom
TET59  10  [TETRODE_128_0.5ID_0.7OD]  40,90 146.5 bottom
TET60  9  [TETRODE_128_0.5ID_0.7OD]  40,90 161.5 bottom
TET61  8  [TETRODE_128_0.5ID_0.7OD]  40,90 176.5 bottom
TET62  12  [TETRODE_128_0.5ID_0.7OD]  40,90 313.5 top
TET63  3  [TETRODE_128_0.5ID_0.7OD]  40,90 313.5 bottom
TET64  0  [TETRODE_128_0.5ID_0.7OD]  90,90 358.5 bottom
TET65  1  [TETRODE_128_0.5ID_0.7OD]  90,90 343.5 bottom
TET66  2  [TETRODE_128_0.5ID_0.7OD]  90,90 328.5 bottom
TET67  4  [TETRODE_128_0.5ID_0.7OD]  90,90 131.5 top
TET68  5  [TETRODE_128_0.5ID_0.7OD]  90,90 146.5 top
TET69  6  [TETRODE_128_0.5ID_0.7OD]  90,90 161.5 top
TET70  7  [TETRODE_128_0.5ID_0.7OD]  90,90 176.5 top
TET71  15  [TETRODE_128_0.5ID_0.7OD]  90,90 358.5 top
TET72  14  [TETRODE_128_0.5ID_0.7OD]  90,90 343.5 top
TET73  13  [TETRODE_128_0.5ID_0.7OD]  90,90 328.5 top
TET74  11  [TETRODE_128_0.5ID_0.7OD]  90,90 131.5 bottom
TET75  10  [TETRODE_128_0.5ID_0.7OD]  90,90 146.5 bottom
TET76  9  [TETRODE_128_0.5ID_0.7OD]  90,90 161.5 bottom
TET77  8  [TETRODE_128_0.5ID_0.7OD]  90,90 176.5 bottom
TET78  12  [TETRODE_128_0.5ID_0.7OD]  90,90 313.5 top
TET79  3  [TETRODE_128_0.5ID_0.7OD]  90,90 313.5 bottom
TET80  0  [TETRODE_128_0.5ID_0.7OD]  140,90 358.5 bottom
TET81  1  [TETRODE_128_0.5ID_0.7OD]  140,90 343.5 bottom
TET82  2  [TETRODE_128_0.5ID_0.7OD]  140,90 328.5 bottom
TET83  4  [TETRODE_128_0.5ID_0.7OD]  140,90 131.5 top
TET84  5  [TETRODE_128_0.5ID_0.7OD]  140,90 146.5 top
TET85  6  [TETRODE_128_0.5ID_0.7OD]  140,90 161.5 top
TET86  7  [TETRODE_128_0.5ID_0.7OD]  140,90 176.5 top
TET87  15  [TETRODE_128_0.5ID_0.7OD]  140,90 358.5 top
TET88  14  [TETRODE_128_0.5ID_0.7OD]  140,90 343.5 top
TET89  13  [TETRODE_128_0.5ID_0.7OD]  140,90 328.5 top
TET90  11  [TETRODE_128_0.5ID_0.7OD]  140,90 131.5 bottom
TET91  10  [TETRODE_128_0.5ID_0.7OD]  140,90 146.5 bottom
TET92  9  [TETRODE_128_0.5ID_0.7OD]  140,90 161.5 bottom
TET93  8  [TETRODE_128_0.5ID_0.7OD]  140,90 176.5 bottom
TET94  12  [TETRODE_128_0.5ID_0.7OD]  140,90 313.5 top
TET95  3  [TETRODE_128_0.5ID_0.7OD]  140,90 313.5 bottom
TET96  0  [TETRODE_128_0.5ID_0.7OD]  40,140 358.5 bottom
TET97  1  [TETRODE_128_0.5ID_0.7OD]  40,140 343.5 bottom
TET98  2  [TETRODE_128_0.5ID_0.7OD]  40,140 328.5 bottom
TET99  4  [TETRODE_128_0.5ID_0.7OD]  40,140 131.5 top
TET100  5  [TETRODE_128_0.5ID_0.7OD]  40,140 146.5 top
TET101  6  [TETRODE_128_0.5ID_0.7OD]  40,140 161.5 top
TET102  7  [TETRODE_128_0.5ID_0.7OD]  40,140 176.5 top
TET103  15  [TETRODE_128_0.5ID_0.7OD]  40,140 358.5 top
TET104  14  [TETRODE_128_0.5ID_0.7OD]  40,140 343.5 top
TET105  13  [TETRODE_128_0.5ID_0.7OD]  40,140 328.5 top
TET106  11  [TETRODE_128_0.5ID_0.7OD]  40,140 131.5 bottom
TET107  10  [TETRODE_128_0.5ID_0.7OD]  40,140 146.5 bottom
TET108  9  [TETRODE_128_0.5ID_0.7OD]  40,140 161.5 bottom
TET109  8  [TETRODE_128_0.5ID_0.7OD]  40,140 176.5 bottom
TET110  12  [TETRODE_128_0.5ID_0.7OD]  40,140 313.5 top
TET111  3  [TETRODE_128_0.5ID_0.7OD]  40,140 313.5 bottom
TET112  0  [TETRODE_128_0.5ID_0.7OD]  90,140 358.5 bottom
TET113  1  [TETRODE_128_0.5ID_0.7OD]  90,140 343.5 bottom
TET114  2  [TETRODE_128_0.5ID_0.7OD]  90,140 328.5 bottom
TET115  4  [TETRODE_128_0.5ID_0.7OD]  90,140 131.5 top
TET116  5  [TETRODE_128_0.5ID_0.7OD]  90,140 146.5 top
TET117  6  [TETRODE_128_0.5ID_0.7OD]  90,140 161.5 top
TET118  7  [TETRODE_128_0.5ID_0.7OD]  90,140 176.5 top
TET119  15  [TETRODE_128_0.5ID_0.7OD]  90,140 358.5 top
TET120  14  [TETRODE_128_0.5ID_0.7OD]  90,140 343.5 top
TET121  13  [TETRODE_128_0.5ID_0.7OD]  90,140 328.5 top
TET122  11  [TETRODE_128_0.5ID_0.7OD]  90,140 131.5 bottom
TET123  10  [TETRODE_128_0.5ID_0.7OD]  90,140 146.5 bottom
TET124  9  [TETRODE_128_0.5ID_0.7OD]  90,140 161.5 bottom
TET125  8  [TETRODE_128_0.5ID_0.7OD]  90,140 176.5 bottom
TET126  12  [TETRODE_128_0.5ID_0.7OD]  90,140 313.5 top
TET127  3  [TETRODE_128_0.5ID_0.7OD]  90,140 313.5 bottom
TET128  0  [TETRODE_128_0.5ID_0.7OD]  140,140 358.5 bottom
TET129  1  [TETRODE_128_0.5ID_0.7OD]  140,140 343.5 bottom
TET130  2  [TETRODE_128_0.5ID_0.7OD]  140,140 328.5 bottom
TET131  4  [TETRODE_128_0.5ID_0.7OD]  140,140 131.5 top
TET132  5  [TETRODE_128_0.5ID_0.7OD]  140,140 146.5 top
TET133  6  [TETRODE_128_0.5ID_0.7OD]  140,140 161.5 top
TET134  7  [TETRODE_128_0.5ID_0.7OD]  140,140 176.5 top
TET135  15  [TETRODE_128_0.5ID_0.7OD]  140,140 358.5 top
TET136  14  [TETRODE_128_0.5ID_0.7OD]  140,140 343.5 top
TET137  13  [TETRODE_128_0.5ID_0.7OD]  140,140 328.5 top
TET138  11  [TETRODE_128_0.5ID_0.7OD]  140,140 131.5 bottom
TET139  10  [TETRODE_128_0.5ID_0.7OD]  140,140 146.5 bottom
TET140  9  [TETRODE_128_0.5ID_0.7OD]  140,140 161.5 bottom
TET141  8  [TETRODE_128_0.5ID_0.7OD]  140,140 176.5 bottom
TET142  12  [TETRODE_128_0.5ID_0.7OD]  140,140 313.5 top
TET143  3  [TETRODE_128_0.5ID_0.7OD]  140,140 313.5 bottom

## Library data of the parts
AN AN1-AN8 CAT0 CAT1-CAT17 ESTIM ESTIM1-ESTIM8 GND0 GND1-GND17 J1-J9 REF REF1-REF8 SHLD_A SHLD_A1-SHLD_A8 TET0 TET1-TET143 = jonnew
E$1-E$3 = fiducial

## Nets
AN: AN.P$1 J1.36
AN1: AN1.P$1 J2.36
AN2: AN2.P$1 J3.36
AN3: AN3.P$1 J4.36
AN4: AN4.P$1 J5.36
AN5: AN5.P$1 J6.36
AN6: AN6.P$1 J7.36
AN7: AN7.P$1 J8.36
AN8: AN8.P$1 J9.36
CAT0: CAT0.P$1 J1.34
CAT1: CAT1.P$1 J1.35
CAT2: CAT2.P$1 J2.34
CAT3: CAT3.P$1 J2.35
CAT4: CAT4.P$1 J3.34
CAT5: CAT5.P$1 J3.35
CAT6: CAT6.P$1 J4.34
CAT7: CAT7.P$1 J4.35
CAT8: CAT8.P$1 J5.34
CAT9: CAT9.P$1 J5.35
CAT10: CAT10.P$1 J6.34
CAT11: CAT11.P$1 J6.35
CAT12: CAT12.P$1 J7.34
CAT13: CAT13.P$1 J7.35
CAT14: CAT14.P$1 J8.34
CAT15: CAT15.P$1 J8.35
CAT16: CAT16.P$1 J9.34
CAT17: CAT17.P$1 J9.35
ESTIM: ESTIM.P$1 J1.1
ESTIM1: ESTIM1.P$1 J2.1
ESTIM2: ESTIM2.P$1 J3.1
ESTIM3: ESTIM3.P$1 J4.1
ESTIM4: ESTIM4.P$1 J5.1
ESTIM5: ESTIM5.P$1 J6.1
ESTIM6: ESTIM6.P$1 J7.1
ESTIM7: ESTIM7.P$1 J8.1
ESTIM8: ESTIM8.P$1 J9.1
GND1: GND0.P$1 GND1.P$1 J1.37 SHLD_A.P$1
GND2: GND2.P$1 GND3.P$1 J2.37 SHLD_A1.P$1
GND3: GND4.P$1 GND5.P$1 J3.37 SHLD_A2.P$1
GND4: GND6.P$1 GND7.P$1 J4.37 SHLD_A3.P$1
GND5: GND8.P$1 GND9.P$1 J5.37 SHLD_A4.P$1
GND6: GND10.P$1 GND11.P$1 J6.37 SHLD_A5.P$1
GND7: GND12.P$1 GND13.P$1 J7.37 SHLD_A6.P$1
GND8: GND14.P$1 GND15.P$1 J8.37 SHLD_A7.P$1
GND9: GND16.P$1 GND17.P$1 J9.37 SHLD_A8.P$1
N$1: J1.69 TET16.3
N$2: J1.66 TET16.0
N$3: J1.67 TET16.1
N$4: J1.68 TET16.2
N$5: J1.65 TET13.3
N$6: J1.64 TET13.2
N$7: J1.63 TET13.1
N$8: J1.62 TET13.0
N$9: J1.61 TET14.3
N$10: J1.60 TET14.2
N$11: J1.59 TET14.1
N$12: J1.58 TET14.0
N$13: J1.57 TET15.3
N$14: J1.56 TET15.2
N$15: J1.55 TET15.1
N$16: J1.54 TET15.0
N$17: J1.53 TET0.0
N$18: J1.52 TET0.1
N$19: J1.51 TET0.2
N$20: J1.50 TET0.3
N$21: J1.49 TET1.0
N$22: J1.48 TET1.1
N$23: J1.47 TET1.2
N$24: J1.46 TET1.3
N$25: J1.45 TET2.0
N$26: J1.44 TET2.1
N$27: J1.43 TET2.2
N$28: J1.42 TET2.3
N$29: J1.41 TET17.0
N$30: J1.40 TET17.1
N$31: J1.39 TET17.2
N$32: J1.38 TET17.3
N$33: J1.5 TET11.0
N$34: J1.4 TET11.1
N$35: J1.3 TET11.2
N$36: J1.2 TET11.3
N$37: J2.33 TET19.3
N$38: J2.32 TET19.2
N$39: J2.31 TET19.1
N$40: J2.30 TET19.0
N$41: J2.29 TET20.3
N$42: J2.28 TET20.2
N$43: J2.27 TET20.1
N$44: J2.26 TET20.0
N$45: J2.25 TET21.3
N$46: J2.24 TET21.2
N$47: J2.23 TET21.1
N$48: J2.22 TET21.0
N$49: J2.21 TET22.3
N$50: J2.20 TET22.2
N$51: J2.19 TET22.1
N$52: J2.18 TET22.0
N$53: J2.17 TET29.0
N$54: J2.16 TET29.1
N$55: J2.15 TET29.2
N$56: J2.14 TET29.3
N$57: J2.13 TET28.0
N$58: J2.12 TET28.1
N$59: J2.11 TET28.2
N$60: J2.10 TET28.3
N$61: J2.9 TET27.0
N$62: J2.8 TET27.1
N$63: J2.7 TET27.2
N$64: J2.6 TET27.3
N$65: J2.69 TET30.3
N$66: J2.67 TET30.1
N$67: J2.65 TET25.3
N$68: J2.64 TET25.2
N$69: J2.63 TET25.1
N$70: J2.62 TET25.0
N$71: J2.61 TET24.3
N$72: J2.60 TET24.2
N$73: J2.59 TET24.1
N$74: J2.58 TET24.0
N$75: J2.57 TET23.3
N$76: J2.56 TET23.2
N$77: J2.55 TET23.1
N$78: J2.54 TET23.0
N$79: J2.53 TET3.0
N$80: J2.52 TET3.1
N$81: J2.51 TET3.2
N$82: J2.50 TET3.3
N$83: J2.49 TET12.0
N$84: J2.48 TET12.1
N$85: J2.47 TET12.2
N$86: J2.46 TET12.3
N$87: J2.45 TET18.0
N$88: J2.44 TET18.1
N$89: J2.43 TET18.2
N$90: J2.42 TET18.3
N$91: J2.41 TET31.0
N$92: J2.39 TET31.2
N$93: J2.5 TET26.0
N$94: J2.4 TET26.1
N$95: J2.3 TET26.2
N$96: J2.2 TET26.3
N$97: J2.66 TET30.0
N$98: J2.68 TET30.2
N$99: J2.40 TET31.1
N$100: J2.38 TET31.3
N$101: J3.33 TET35.3
N$102: J3.32 TET35.2
N$103: J3.31 TET35.1
N$104: J3.30 TET35.0
N$105: J3.29 TET36.3
N$106: J3.28 TET36.2
N$107: J3.27 TET36.1
N$108: J3.26 TET36.0
N$109: J3.25 TET37.3
N$110: J3.24 TET37.2
N$111: J3.23 TET37.1
N$112: J3.22 TET37.0
N$113: J3.21 TET38.3
N$114: J3.20 TET38.2
N$115: J3.19 TET38.1
N$116: J3.18 TET38.0
N$117: J3.17 TET45.0
N$118: J3.16 TET45.1
N$119: J3.15 TET45.2
N$120: J3.14 TET45.3
N$121: J3.13 TET44.0
N$122: J3.12 TET44.1
N$123: J3.11 TET44.2
N$124: J3.10 TET44.3
N$125: J3.9 TET43.0
N$126: J3.8 TET43.1
N$127: J3.7 TET43.2
N$128: J3.6 TET43.3
N$129: J3.69 TET46.3
N$130: J3.67 TET46.1
N$131: J3.65 TET41.3
N$132: J3.64 TET41.2
N$133: J3.63 TET41.1
N$134: J3.62 TET41.0
N$135: J3.61 TET40.3
N$136: J3.60 TET40.2
N$137: J3.59 TET40.1
N$138: J3.58 TET40.0
N$139: J3.57 TET39.3
N$140: J3.56 TET39.2
N$141: J3.55 TET39.1
N$142: J3.54 TET39.0
N$143: J3.53 TET32.0
N$144: J3.52 TET32.1
N$145: J3.51 TET32.2
N$146: J3.50 TET32.3
N$147: J3.49 TET33.0
N$148: J3.48 TET33.1
N$149: J3.47 TET33.2
N$150: J3.46 TET33.3
N$151: J3.45 TET34.0
N$152: J3.44 TET34.1
N$153: J3.43 TET34.2
N$154: J3.42 TET34.3
N$155: J3.41 TET47.0
N$156: J3.39 TET47.2
N$157: J3.5 TET42.0
N$158: J3.4 TET42.1
N$159: J3.3 TET42.2
N$160: J3.2 TET42.3
N$161: J3.66 TET46.0
N$162: J3.68 TET46.2
N$163: J3.40 TET47.1
N$164: J3.38 TET47.3
N$165: J4.33 TET51.3
N$166: J4.32 TET51.2
N$167: J4.31 TET51.1
N$168: J4.30 TET51.0
N$169: J4.29 TET52.3
N$170: J4.28 TET52.2
N$171: J4.27 TET52.1
N$172: J4.26 TET52.0
N$173: J4.25 TET53.3
N$174: J4.24 TET53.2
N$175: J4.23 TET53.1
N$176: J4.22 TET53.0
N$177: J4.21 TET54.3
N$178: J4.20 TET54.2
N$179: J4.19 TET54.1
N$180: J4.18 TET54.0
N$181: J4.17 TET61.0
N$182: J4.16 TET61.1
N$183: J4.15 TET61.2
N$184: J4.14 TET61.3
N$185: J4.13 TET60.0
N$186: J4.12 TET60.1
N$187: J4.11 TET60.2
N$188: J4.10 TET60.3
N$189: J4.9 TET59.0
N$190: J4.8 TET59.1
N$191: J4.7 TET59.2
N$192: J4.6 TET59.3
N$193: J4.69 TET62.3
N$194: J4.67 TET62.1
N$195: J4.65 TET57.3
N$196: J4.64 TET57.2
N$197: J4.63 TET57.1
N$198: J4.62 TET57.0
N$199: J1.33 TET4.3
N$200: J1.32 TET4.2
N$201: J1.31 TET4.1
N$202: J1.30 TET4.0
N$203: J1.29 TET5.3
N$204: J1.28 TET5.2
N$205: J1.27 TET5.1
N$206: J1.26 TET5.0
N$207: J1.25 TET6.3
N$208: J1.24 TET6.2
N$209: J1.23 TET6.1
N$210: J1.22 TET6.0
N$211: J1.21 TET7.3
N$212: J1.20 TET7.2
N$213: J1.19 TET7.1
N$214: J1.18 TET7.0
N$215: J1.17 TET8.0
N$216: J1.16 TET8.1
N$217: J1.15 TET8.2
N$218: J1.14 TET8.3
N$219: J1.13 TET9.0
N$220: J1.12 TET9.1
N$221: J1.11 TET9.2
N$222: J1.10 TET9.3
N$223: J1.9 TET10.0
N$224: J1.8 TET10.1
N$225: J1.7 TET10.2
N$226: J1.6 TET10.3
N$227: J4.61 TET56.3
N$228: J4.60 TET56.2
N$229: J4.59 TET56.1
N$230: J4.58 TET56.0
N$231: J4.57 TET55.3
N$232: J4.56 TET55.2
N$233: J4.55 TET55.1
N$234: J4.54 TET55.0
N$235: J4.53 TET48.0
N$236: J4.52 TET48.1
N$237: J4.51 TET48.2
N$238: J4.50 TET48.3
N$239: J4.49 TET49.0
N$240: J4.48 TET49.1
N$241: J4.47 TET49.2
N$242: J4.46 TET49.3
N$243: J4.45 TET50.0
N$244: J4.44 TET50.1
N$245: J4.43 TET50.2
N$246: J4.42 TET50.3
N$247: J4.41 TET63.0
N$248: J4.39 TET63.2
N$249: J4.5 TET58.0
N$250: J4.4 TET58.1
N$251: J4.3 TET58.2
N$252: J4.2 TET58.3
N$253: J4.66 TET62.0
N$254: J4.68 TET62.2
N$255: J4.40 TET63.1
N$256: J4.38 TET63.3
N$257: J5.33 TET67.3
N$258: J5.32 TET67.2
N$259: J5.31 TET67.1
N$260: J5.30 TET67.0
N$261: J5.29 TET68.3
N$262: J5.28 TET68.2
N$263: J5.27 TET68.1
N$264: J5.26 TET68.0
N$265: J5.25 TET69.3
N$266: J5.24 TET69.2
N$267: J5.23 TET69.1
N$268: J5.22 TET69.0
N$269: J5.21 TET70.3
N$270: J5.20 TET70.2
N$271: J5.19 TET70.1
N$272: J5.18 TET70.0
N$273: J5.17 TET77.0
N$274: J5.16 TET77.1
N$275: J5.15 TET77.2
N$276: J5.14 TET77.3
N$277: J5.13 TET76.0
N$278: J5.12 TET76.1
N$279: J5.11 TET76.2
N$280: J5.10 TET76.3
N$281: J5.9 TET75.0
N$282: J5.8 TET75.1
N$283: J5.7 TET75.2
N$284: J5.6 TET75.3
N$285: J5.69 TET78.3
N$286: J5.67 TET78.1
N$287: J5.65 TET73.3
N$288: J5.64 TET73.2
N$289: J5.63 TET73.1
N$290: J5.62 TET73.0
N$291: J5.61 TET72.3
N$292: J5.60 TET72.2
N$293: J5.59 TET72.1
N$294: J5.58 TET72.0
N$295: J5.57 TET71.3
N$296: J5.56 TET71.2
N$297: J5.55 TET71.1
N$298: J5.54 TET71.0
N$299: J5.53 TET64.0
N$300: J5.52 TET64.1
N$301: J5.51 TET64.2
N$302: J5.50 TET64.3
N$303: J5.49 TET65.0
N$304: J5.48 TET65.1
N$305: J5.47 TET65.2
N$306: J5.46 TET65.3
N$307: J5.45 TET66.0
N$308: J5.44 TET66.1
N$309: J5.43 TET66.2
N$310: J5.42 TET66.3
N$311: J5.41 TET79.0
N$312: J5.39 TET79.2
N$313: J5.5 TET74.0
N$314: J5.4 TET74.1
N$315: J5.3 TET74.2
N$316: J5.2 TET74.3
N$317: J5.66 TET78.0
N$318: J5.68 TET78.2
N$319: J5.40 TET79.1
N$320: J5.38 TET79.3
N$321: J6.33 TET83.3
N$322: J6.32 TET83.2
N$323: J6.31 TET83.1
N$324: J6.30 TET83.0
N$325: J6.29 TET84.3
N$326: J6.28 TET84.2
N$327: J6.27 TET84.1
N$328: J6.26 TET84.0
N$329: J6.25 TET85.3
N$330: J6.24 TET85.2
N$331: J6.23 TET85.1
N$332: J6.22 TET85.0
N$333: J6.21 TET86.3
N$334: J6.20 TET86.2
N$335: J6.19 TET86.1
N$336: J6.18 TET86.0
N$337: J6.17 TET93.0
N$338: J6.16 TET93.1
N$339: J6.15 TET93.2
N$340: J6.14 TET93.3
N$341: J6.13 TET92.0
N$342: J6.12 TET92.1
N$343: J6.11 TET92.2
N$344: J6.10 TET92.3
N$345: J6.9 TET91.0
N$346: J6.8 TET91.1
N$347: J6.7 TET91.2
N$348: J6.6 TET91.3
N$349: J6.69 TET94.3
N$350: J6.67 TET94.1
N$351: J6.65 TET89.3
N$352: J6.64 TET89.2
N$353: J6.63 TET89.1
N$354: J6.62 TET89.0
N$355: J6.61 TET88.3
N$356: J6.60 TET88.2
N$357: J6.59 TET88.1
N$358: J6.58 TET88.0
N$359: J6.57 TET87.3
N$360: J6.56 TET87.2
N$361: J6.55 TET87.1
N$362: J6.54 TET87.0
N$363: J6.53 TET80.0
N$364: J6.52 TET80.1
N$365: J6.51 TET80.2
N$366: J6.50 TET80.3
N$367: J6.49 TET81.0
N$368: J6.48 TET81.1
N$369: J6.47 TET81.2
N$370: J6.46 TET81.3
N$371: J6.45 TET82.0
N$372: J6.44 TET82.1
N$373: J6.43 TET82.2
N$374: J6.42 TET82.3
N$375: J6.41 TET95.0
N$376: J6.39 TET95.2
N$377: J6.5 TET90.0
N$378: J6.4 TET90.1
N$379: J6.3 TET90.2
N$380: J6.2 TET90.3
N$381: J6.66 TET94.0
N$382: J6.68 TET94.2
N$383: J6.40 TET95.1
N$384: J6.38 TET95.3
N$385: J7.33 TET99.3
N$386: J7.32 TET99.2
N$387: J7.31 TET99.1
N$388: J7.30 TET99.0
N$389: J7.29 TET100.3
N$390: J7.28 TET100.2
N$391: J7.27 TET100.1
N$392: J7.26 TET100.0
N$393: J7.25 TET101.3
N$394: J7.24 TET101.2
N$395: J7.23 TET101.1
N$396: J7.22 TET101.0
N$397: J7.21 TET102.3
N$398: J7.20 TET102.2
N$399: J7.19 TET102.1
N$400: J7.18 TET102.0
N$401: J7.17 TET109.0
N$402: J7.16 TET109.1
N$403: J7.15 TET109.2
N$404: J7.14 TET109.3
N$405: J7.13 TET108.0
N$406: J7.12 TET108.1
N$407: J7.11 TET108.2
N$408: J7.10 TET108.3
N$409: J7.9 TET107.0
N$410: J7.8 TET107.1
N$411: J7.7 TET107.2
N$412: J7.6 TET107.3
N$413: J7.69 TET110.3
N$414: J7.67 TET110.1
N$415: J7.65 TET105.3
N$416: J7.64 TET105.2
N$417: J7.63 TET105.1
N$418: J7.62 TET105.0
N$419: J7.61 TET104.3
N$420: J7.60 TET104.2
N$421: J7.59 TET104.1
N$422: J7.58 TET104.0
N$423: J7.57 TET103.3
N$424: J7.56 TET103.2
N$425: J7.55 TET103.1
N$426: J7.54 TET103.0
N$427: J7.53 TET96.0
N$428: J7.52 TET96.1
N$429: J7.51 TET96.2
N$430: J7.50 TET96.3
N$431: J7.49 TET97.0
N$432: J7.48 TET97.1
N$433: J7.47 TET97.2
N$434: J7.46 TET97.3
N$435: J7.45 TET98.0
N$436: J7.44 TET98.1
N$437: J7.43 TET98.2
N$438: J7.42 TET98.3
N$439: J7.41 TET111.0
N$440: J7.39 TET111.2
N$441: J7.5 TET106.0
N$442: J7.4 TET106.1
N$443: J7.3 TET106.2
N$444: J7.2 TET106.3
N$445: J7.66 TET110.0
N$446: J7.68 TET110.2
N$447: J7.40 TET111.1
N$448: J7.38 TET111.3
N$449: J8.33 TET115.3
N$450: J8.32 TET115.2
N$451: J8.31 TET115.1
N$452: J8.30 TET115.0
N$453: J8.29 TET116.3
N$454: J8.28 TET116.2
N$455: J8.27 TET116.1
N$456: J8.26 TET116.0
N$457: J8.25 TET117.3
N$458: J8.24 TET117.2
N$459: J8.23 TET117.1
N$460: J8.22 TET117.0
N$461: J8.21 TET118.3
N$462: J8.20 TET118.2
N$463: J8.19 TET118.1
N$464: J8.18 TET118.0
N$465: J8.17 TET125.0
N$466: J8.16 TET125.1
N$467: J8.15 TET125.2
N$468: J8.14 TET125.3
N$469: J8.13 TET124.0
N$470: J8.12 TET124.1
N$471: J8.11 TET124.2
N$472: J8.10 TET124.3
N$473: J8.9 TET123.0
N$474: J8.8 TET123.1
N$475: J8.7 TET123.2
N$476: J8.6 TET123.3
N$477: J8.69 TET126.3
N$478: J8.67 TET126.1
N$479: J8.65 TET121.3
N$480: J8.64 TET121.2
N$481: J8.63 TET121.1
N$482: J8.62 TET121.0
N$483: J8.61 TET120.3
N$484: J8.60 TET120.2
N$485: J8.59 TET120.1
N$486: J8.58 TET120.0
N$487: J8.57 TET119.3
N$488: J8.56 TET119.2
N$489: J8.55 TET119.1
N$490: J8.54 TET119.0
N$491: J8.53 TET112.0
N$492: J8.52 TET112.1
N$493: J8.51 TET112.2
N$494: J8.50 TET112.3
N$495: J8.49 TET113.0
N$496: J8.48 TET113.1
N$497: J8.47 TET113.2
N$498: J8.46 TET113.3
N$499: J8.45 TET114.0
N$500: J8.44 TET114.1
N$501: J8.43 TET114.2
N$502: J8.42 TET114.3
N$503: J8.41 TET127.0
N$504: J8.39 TET127.2
N$505: J8.5 TET122.0
N$506: J8.4 TET122.1
N$507: J8.3 TET122.2
N$508: J8.2 TET122.3
N$509: J8.66 TET126.0
N$510: J8.68 TET126.2
N$511: J8.40 TET127.1
N$512: J8.38 TET127.3
N$513: J9.33 TET131.3
N$514: J9.32 TET131.2
N$515: J9.31 TET131.1
N$516: J9.30 TET131.0
N$517: J9.29 TET132.3
N$518: J9.28 TET132.2
N$519: J9.27 TET132.1
N$520: J9.26 TET132.0
N$521: J9.25 TET133.3
N$522: J9.24 TET133.2
N$523: J9.23 TET133.1
N$524: J9.22 TET133.0
N$525: J9.21 TET134.3
N$526: J9.20 TET134.2
N$527: J9.19 TET134.1
N$528: J9.18 TET134.0
N$529: J9.17 TET141.0
N$530: J9.16 TET141.1
N$531: J9.15 TET141.2
N$532: J9.14 TET141.3
N$533: J9.13 TET140.0
N$534: J9.12 TET140.1
N$535: J9.11 TET140.2
N$536: J9.10 TET140.3
N$537: J9.9 TET139.0
N$538: J9.8 TET139.1
N$539: J9.7 TET139.2
N$540: J9.6 TET139.3
N$541: J9.69 TET142.3
N$542: J9.67 TET142.1
N$543: J9.65 TET137.3
N$544: J9.64 TET137.2
N$545: J9.63 TET137.1
N$546: J9.62 TET137.0
N$547: J9.61 TET136.3
N$548: J9.60 TET136.2
N$549: J9.59 TET136.1
N$550: J9.58 TET136.0
N$551: J9.57 TET135.3
N$552: J9.56 TET135.2
N$553: J9.55 TET135.1
N$554: J9.54 TET135.0
N$555: J9.53 TET128.0
N$556: J9.52 TET128.1
N$557: J9.51 TET128.2
N$558: J9.50 TET128.3
N$559: J9.49 TET129.0
N$560: J9.48 TET129.1
N$561: J9.47 TET129.2
N$562: J9.46 TET129.3
N$563: J9.45 TET130.0
N$564: J9.44 TET130.1
N$565: J9.43 TET130.2
N$566: J9.42 TET130.3
N$567: J9.41 TET143.0
N$568: J9.39 TET143.2
N$569: J9.5 TET138.0
N$570: J9.4 TET138.1
N$571: J9.3 TET138.2
N$572: J9.2 TET138.3
N$573: J9.66 TET142.0
N$574: J9.68 TET142.2
N$575: J9.40 TET143.1
N$576: J9.38 TET143.3
REF: J1.70 REF.P$1
REF1: J2.70 REF1.P$1
REF2: J3.70 REF2.P$1
REF3: J4.70 REF3.P$1
REF4: J5.70 REF4.P$1
REF5: J6.70 REF5.P$1
REF6: J7.70 REF6.P$1
REF7: J8.70 REF7.P$1
REF8: J9.70 REF8.P$1

## Tracks (layer width: path | path; a pad name or v marks a point on that pad's centre or on a via)
AN  (via drill 0.2)
  Top 0.15: v31.4,42.3 33.08,42.3 J1.36
  Route2 0.2: v31.4,42.3 24.7,42.3 AN.P$1
AN1  (via drill 0.2)
  Top 0.15: v81.4,42.3 83.08,42.3 J2.36
  Route2 0.2: v81.4,42.3 74.7,42.3 AN1.P$1
AN2  (via drill 0.2)
  Top 0.15: v131.4,42.3 133.08,42.3 J3.36
  Route2 0.2: v131.4,42.3 124.7,42.3 AN2.P$1
AN3  (via drill 0.2)
  Top 0.15: v31.4,92.3 33.08,92.3 J4.36
  Route2 0.2: v31.4,92.3 24.7,92.3 AN3.P$1
AN4  (via drill 0.2)
  Top 0.15: v81.4,92.3 83.08,92.3 J5.36
  Route2 0.2: v81.4,92.3 74.7,92.3 AN4.P$1
AN5  (via drill 0.2)
  Top 0.15: v131.4,92.3 133.08,92.3 J6.36
  Route2 0.2: v131.4,92.3 124.7,92.3 AN5.P$1
AN6  (via drill 0.2)
  Top 0.15: v31.4,142.3 33.08,142.3 J7.36
  Route2 0.2: v31.4,142.3 24.7,142.3 AN6.P$1
AN7  (via drill 0.2)
  Top 0.15: v81.4,142.3 83.08,142.3 J8.36
  Route2 0.2: v81.4,142.3 74.7,142.3 AN7.P$1
AN8  (via drill 0.2)
  Top 0.15: v131.4,142.3 133.08,142.3 J9.36
  Route2 0.2: v131.4,142.3 124.7,142.3 AN8.P$1
CAT0  (via drill 0.2)
  Top 0.2: v30.2,38.5 30.6,38.1 33.3,38.1 33.6,38.4 J1.34
  Route2 0.2: v30.2,38.5 25.5,38.5 CAT0.P$1
CAT1  (via drill 0.2)
  Top 0.2: v30.4,39.9 32.88,39.9 J1.35
  Route2 0.127: v30.4,39.9 30.3,40
  Route2 0.2: 30.3,40 CAT1.P$1
CAT2  (via drill 0.2)
  Top 0.2: v80.2,38.5 80.6,38.1 83.3,38.1 83.6,38.4 J2.34
  Route2 0.2: v80.2,38.5 75.5,38.5 CAT2.P$1
CAT3  (via drill 0.2)
  Top 0.2: v80.4,39.9 82.88,39.9 J2.35
  Route2 0.127: v80.4,39.9 80.3,40
  Route2 0.2: 80.3,40 CAT3.P$1
CAT4  (via drill 0.2)
  Top 0.2: v130.2,38.5 130.6,38.1 133.3,38.1 133.6,38.4 J3.34
  Route2 0.2: v130.2,38.5 125.5,38.5 CAT4.P$1
CAT5  (via drill 0.2)
  Top 0.2: v130.4,39.9 132.88,39.9 J3.35
  Route2 0.127: v130.4,39.9 130.3,40
  Route2 0.2: 130.3,40 CAT5.P$1
CAT6  (via drill 0.2)
  Top 0.2: v30.2,88.5 30.6,88.1 33.3,88.1 33.6,88.4 J4.34
  Route2 0.2: v30.2,88.5 25.5,88.5 CAT6.P$1
CAT7  (via drill 0.2)
  Top 0.2: v30.4,89.9 32.88,89.9 J4.35
  Route2 0.127: v30.4,89.9 30.3,90
  Route2 0.2: 30.3,90 CAT7.P$1
CAT8  (via drill 0.2)
  Top 0.2: v80.2,88.5 80.6,88.1 83.3,88.1 83.6,88.4 J5.34
  Route2 0.2: v80.2,88.5 75.5,88.5 CAT8.P$1
CAT9  (via drill 0.2)
  Top 0.2: v80.4,89.9 82.88,89.9 J5.35
  Route2 0.127: v80.4,89.9 80.3,90
  Route2 0.2: 80.3,90 CAT9.P$1
CAT10  (via drill 0.2)
  Top 0.2: v130.2,88.5 130.6,88.1 133.3,88.1 133.6,88.4 J6.34
  Route2 0.2: v130.2,88.5 125.5,88.5 CAT10.P$1
CAT11  (via drill 0.2)
  Top 0.2: v130.4,89.9 132.88,89.9 J6.35
  Route2 0.127: v130.4,89.9 130.3,90
  Route2 0.2: 130.3,90 CAT11.P$1
CAT12  (via drill 0.2)
  Top 0.2: v30.2,138.5 30.6,138.1 33.3,138.1 33.6,138.4 J7.34
  Route2 0.2: v30.2,138.5 25.5,138.5 CAT12.P$1
CAT13  (via drill 0.2)
  Top 0.2: v30.4,139.9 32.88,139.9 J7.35
  Route2 0.127: v30.4,139.9 30.3,140
  Route2 0.2: 30.3,140 CAT13.P$1
CAT14  (via drill 0.2)
  Top 0.2: v80.2,138.5 80.6,138.1 83.3,138.1 83.6,138.4 J8.34
  Route2 0.2: v80.2,138.5 75.5,138.5 CAT14.P$1
CAT15  (via drill 0.2)
  Top 0.2: v80.4,139.9 82.88,139.9 J8.35
  Route2 0.127: v80.4,139.9 80.3,140
  Route2 0.2: 80.3,140 CAT15.P$1
CAT16  (via drill 0.2)
  Top 0.2: v130.2,138.5 130.6,138.1 133.3,138.1 133.6,138.4 J9.34
  Route2 0.2: v130.2,138.5 125.5,138.5 CAT16.P$1
CAT17  (via drill 0.2)
  Top 0.2: v130.4,139.9 132.88,139.9 J9.35
  Route2 0.127: v130.4,139.9 130.3,140
  Route2 0.2: 130.3,140 CAT17.P$1
ESTIM  (via drill 0.2)
  Top 0.15: J1.1 46.87,39.65 47.95,39.65 v48.9,38.7
  Route2 0.2: ESTIM.P$1 50.6,37 v48.9,38.7
ESTIM1  (via drill 0.2)
  Top 0.15: J2.1 96.87,39.65 97.95,39.65 v98.9,38.7
  Route2 0.2: ESTIM1.P$1 100.6,37 v98.9,38.7
ESTIM2  (via drill 0.2)
  Top 0.15: J3.1 146.87,39.65 147.95,39.65 v148.9,38.7
  Route2 0.2: ESTIM2.P$1 150.6,37 v148.9,38.7
ESTIM3  (via drill 0.2)
  Top 0.15: J4.1 46.87,89.65 47.95,89.65 v48.9,88.7
  Route2 0.2: ESTIM3.P$1 50.6,87 v48.9,88.7
ESTIM4  (via drill 0.2)
  Top 0.15: J5.1 96.87,89.65 97.95,89.65 v98.9,88.7
  Route2 0.2: ESTIM4.P$1 100.6,87 v98.9,88.7
ESTIM5  (via drill 0.2)
  Top 0.15: J6.1 146.87,89.65 147.95,89.65 v148.9,88.7
  Route2 0.2: ESTIM5.P$1 150.6,87 v148.9,88.7
ESTIM6  (via drill 0.2)
  Top 0.15: J7.1 46.87,139.65 47.95,139.65 v48.9,138.7
  Route2 0.2: ESTIM6.P$1 50.6,137 v48.9,138.7
ESTIM7  (via drill 0.2)
  Top 0.15: J8.1 96.87,139.65 97.95,139.65 v98.9,138.7
  Route2 0.2: ESTIM7.P$1 100.6,137 v98.9,138.7
ESTIM8  (via drill 0.2)
  Top 0.15: J9.1 146.87,139.65 147.95,139.65 v148.9,138.7
  Route2 0.2: ESTIM8.P$1 150.6,137 v148.9,138.7
GND1  (via drill 0.2)
  other vias: 47.5,39.2 47.5,40.8 45.3,45.35 22,35 23,33 28,36 22,41 22,45 23,48 28,44 26,44 26,37 52,35 49,36 53,33 54,39 51,40 51,44 55,44 57,48 59,44 59,36 58,33 46,28 40,22 35,26 35,52 40,50 40,54 45,54 45,50 35,49 35,55 31,52 49,52 54,48 50,47 27,46 40,28 40,30 40,23 40,25 35,28 59,40 22,38 48,26 33.2,41.2 32,41.2
  pour Route15 (isolate 0.1): 19.45,61.35 47.15,61.35 60.45,48.05 60.45,19.35 32.15,19.35 19.45,32.05
  pour Route2 (isolate 0.1): 19.45,61.35 47.15,61.35 60.45,48.05 60.45,19.35 32.15,19.35 19.45,32.05
  pour Bottom (isolate 0.1): 19.45,61.35 47.15,61.35 60.45,48.05 60.45,19.35 32.15,19.35 19.45,32.05
  pour Top (isolate 0.1): 19.45,61.35 47.15,61.35 60.45,48.05 60.45,19.35 32.15,19.35 19.45,32.05
GND2  (via drill 0.2)
  other vias: 97.5,39.2 97.5,40.8 95.3,45.35 72,35 73,33 78,36 72,41 72,45 73,48 78,44 76,44 76,37 102,35 99,36 103,33 104,39 101,40 101,44 105,44 107,48 109,44 109,36 108,33 96,28 90,22 85,26 85,52 90,50 90,54 95,54 95,50 85,49 85,55 81,52 99,52 104,48 100,47 77,46 90,28 90,30 90,23 90,25 85,28 109,40 72,38 98,26 83.2,41.2 82,41.2
  pour Route15 (isolate 0.1): 69.45,61.35 97.15,61.35 110.45,48.05 110.45,19.35 82.15,19.35 69.45,32.05
  pour Route2 (isolate 0.1): 69.45,61.35 97.15,61.35 110.45,48.05 110.45,19.35 82.15,19.35 69.45,32.05
  pour Bottom (isolate 0.1): 69.45,61.35 97.15,61.35 110.45,48.05 110.45,19.35 82.15,19.35 69.45,32.05
  pour Top (isolate 0.1): 69.45,61.35 97.15,61.35 110.45,48.05 110.45,19.35 82.15,19.35 69.45,32.05
GND3  (via drill 0.2)
  other vias: 147.5,39.2 147.5,40.8 145.3,45.35 122,35 123,33 128,36 122,41 122,45 123,48 128,44 126,44 126,37 152,35 149,36 153,33 154,39 151,40 151,44 155,44 157,48 159,44 159,36 158,33 146,28 140,22 135,26 135,52 140,50 140,54 145,54 145,50 135,49 135,55 131,52 149,52 154,48 150,47 127,46 140,28 140,30 140,23 140,25 135,28 159,40 122,38 148,26 133.2,41.2 132,41.2
  pour Route15 (isolate 0.1): 119.45,61.35 147.15,61.35 160.45,48.05 160.45,19.35 132.15,19.35 119.45,32.05
  pour Route2 (isolate 0.1): 119.45,61.35 147.15,61.35 160.45,48.05 160.45,19.35 132.15,19.35 119.45,32.05
  pour Bottom (isolate 0.1): 119.45,61.35 147.15,61.35 160.45,48.05 160.45,19.35 132.15,19.35 119.45,32.05
  pour Top (isolate 0.1): 119.45,61.35 147.15,61.35 160.45,48.05 160.45,19.35 132.15,19.35 119.45,32.05
GND4  (via drill 0.2)
  other vias: 47.5,89.2 47.5,90.8 45.3,95.35 22,85 23,83 28,86 22,91 22,95 23,98 28,94 26,94 26,87 52,85 49,86 53,83 54,89 51,90 51,94 55,94 57,98 59,94 59,86 58,83 46,78 40,72 35,76 35,102 40,100 40,104 45,104 45,100 35,99 35,105 31,102 49,102 54,98 50,97 27,96 40,78 40,80 40,73 40,75 35,78 59,90 22,88 48,76 33.2,91.2 32,91.2
  pour Route15 (isolate 0.1): 19.45,111.35 47.15,111.35 60.45,98.05 60.45,69.35 32.15,69.35 19.45,82.05
  pour Route2 (isolate 0.1): 19.45,111.35 47.15,111.35 60.45,98.05 60.45,69.35 32.15,69.35 19.45,82.05
  pour Bottom (isolate 0.1): 19.45,111.35 47.15,111.35 60.45,98.05 60.45,69.35 32.15,69.35 19.45,82.05
  pour Top (isolate 0.1): 19.45,111.35 47.15,111.35 60.45,98.05 60.45,69.35 32.15,69.35 19.45,82.05
GND5  (via drill 0.2)
  other vias: 97.5,89.2 97.5,90.8 95.3,95.35 72,85 73,83 78,86 72,91 72,95 73,98 78,94 76,94 76,87 102,85 99,86 103,83 104,89 101,90 101,94 105,94 107,98 109,94 109,86 108,83 96,78 90,72 85,76 85,102 90,100 90,104 95,104 95,100 85,99 85,105 81,102 99,102 104,98 100,97 77,96 90,78 90,80 90,73 90,75 85,78 109,90 72,88 98,76 83.2,91.2 82,91.2
  pour Route15 (isolate 0.1): 69.45,111.35 97.15,111.35 110.45,98.05 110.45,69.35 82.15,69.35 69.45,82.05
  pour Route2 (isolate 0.1): 69.45,111.35 97.15,111.35 110.45,98.05 110.45,69.35 82.15,69.35 69.45,82.05
  pour Bottom (isolate 0.1): 69.45,111.35 97.15,111.35 110.45,98.05 110.45,69.35 82.15,69.35 69.45,82.05
  pour Top (isolate 0.1): 69.45,111.35 97.15,111.35 110.45,98.05 110.45,69.35 82.15,69.35 69.45,82.05
GND6  (via drill 0.2)
  other vias: 147.5,89.2 147.5,90.8 145.3,95.35 122,85 123,83 128,86 122,91 122,95 123,98 128,94 126,94 126,87 152,85 149,86 153,83 154,89 151,90 151,94 155,94 157,98 159,94 159,86 158,83 146,78 140,72 135,76 135,102 140,100 140,104 145,104 145,100 135,99 135,105 131,102 149,102 154,98 150,97 127,96 140,78 140,80 140,73 140,75 135,78 159,90 122,88 148,76 133.2,91.2 132,91.2
  pour Route15 (isolate 0.1): 119.45,111.35 147.15,111.35 160.45,98.05 160.45,69.35 132.15,69.35 119.45,82.05
  pour Route2 (isolate 0.1): 119.45,111.35 147.15,111.35 160.45,98.05 160.45,69.35 132.15,69.35 119.45,82.05
  pour Bottom (isolate 0.1): 119.45,111.35 147.15,111.35 160.45,98.05 160.45,69.35 132.15,69.35 119.45,82.05
  pour Top (isolate 0.1): 119.45,111.35 147.15,111.35 160.45,98.05 160.45,69.35 132.15,69.35 119.45,82.05
GND7  (via drill 0.2)
  other vias: 47.5,139.2 47.5,140.8 45.3,145.35 22,135 23,133 28,136 22,141 22,145 23,148 28,144 26,144 26,137 52,135 49,136 53,133 54,139 51,140 51,144 55,144 57,148 59,144 59,136 58,133 46,128 40,122 35,126 35,152 40,150 40,154 45,154 45,150 35,149 35,155 31,152 49,152 54,148 50,147 27,146 40,128 40,130 40,123 40,125 35,128 59,140 22,138 48,126 33.2,141.2 32,141.2
  pour Route15 (isolate 0.1): 19.45,161.35 47.15,161.35 60.45,148.05 60.45,119.35 32.15,119.35 19.45,132.05
  pour Route2 (isolate 0.1): 19.45,161.35 47.15,161.35 60.45,148.05 60.45,119.35 32.15,119.35 19.45,132.05
  pour Bottom (isolate 0.1): 19.45,161.35 47.15,161.35 60.45,148.05 60.45,119.35 32.15,119.35 19.45,132.05
  pour Top (isolate 0.1): 19.45,161.35 47.15,161.35 60.45,148.05 60.45,119.35 32.15,119.35 19.45,132.05
GND8  (via drill 0.2)
  other vias: 97.5,139.2 97.5,140.8 95.3,145.35 72,135 73,133 78,136 72,141 72,145 73,148 78,144 76,144 76,137 102,135 99,136 103,133 104,139 101,140 101,144 105,144 107,148 109,144 109,136 108,133 96,128 90,122 85,126 85,152 90,150 90,154 95,154 95,150 85,149 85,155 81,152 99,152 104,148 100,147 77,146 90,128 90,130 90,123 90,125 85,128 109,140 72,138 98,126 83.2,141.2 82,141.2
  pour Route15 (isolate 0.1): 69.45,161.35 97.15,161.35 110.45,148.05 110.45,119.35 82.15,119.35 69.45,132.05
  pour Route2 (isolate 0.1): 69.45,161.35 97.15,161.35 110.45,148.05 110.45,119.35 82.15,119.35 69.45,132.05
  pour Bottom (isolate 0.1): 69.45,161.35 97.15,161.35 110.45,148.05 110.45,119.35 82.15,119.35 69.45,132.05
  pour Top (isolate 0.1): 69.45,161.35 97.15,161.35 110.45,148.05 110.45,119.35 82.15,119.35 69.45,132.05
GND9  (via drill 0.2)
  other vias: 147.5,139.2 147.5,140.8 145.3,145.35 122,135 123,133 128,136 122,141 122,145 123,148 128,144 126,144 126,137 152,135 149,136 153,133 154,139 151,140 151,144 155,144 157,148 159,144 159,136 158,133 146,128 140,122 135,126 135,152 140,150 140,154 145,154 145,150 135,149 135,155 131,152 149,152 154,148 150,147 127,146 140,128 140,130 140,123 140,125 135,128 159,140 122,138 148,126 133.2,141.2 132,141.2
  pour Route15 (isolate 0.1): 119.45,161.35 147.15,161.35 160.45,148.05 160.45,119.35 132.15,119.35 119.45,132.05
  pour Route2 (isolate 0.1): 119.45,161.35 147.15,161.35 160.45,148.05 160.45,119.35 132.15,119.35 119.45,132.05
  pour Bottom (isolate 0.1): 119.45,161.35 147.15,161.35 160.45,148.05 160.45,119.35 132.15,119.35 119.45,132.05
  pour Top (isolate 0.1): 119.45,161.35 147.15,161.35 160.45,148.05 160.45,119.35 132.15,119.35 119.45,132.05
N$1  (via drill 0.2)
  Top 0.127: J1.69 v46.4,43.65
  Route2 0.127: TET16.3 48.82,43.8 46.55,43.8 v46.4,43.65
N$2  (via drill 0.2)
  Top 0.127: J1.66 v45.2,41.3
  Route15 0.127: TET16.0 47.1,45.42 47.1,43.8 45.2,41.9 v45.2,41.3
N$3  (via drill 0.2)
  Top 0.127: J1.67 v45.6,43.55
  Route2 0.127: TET16.1 54.5,51.9 53.5,50.9 52.95,50.9 v45.6,43.55
N$4  (via drill 0.2)
  Top 0.127: 46,43.01 J1.68 v46,41.3
  Route15 0.127: TET16.2 51.5,47.82 51.5,47.2 46,41.7 v46,41.3
N$5  (via drill 0.2)
  Top 0.127: J1.65 v44.8,43.55
  Route2 0.127: TET13.3 52.3,54.28 52.3,51.05 v44.8,43.55
N$6  (via drill 0.2)
  Top 0.127: J1.64 v44.4,41.3
  Route15 0.127: TET13.2 51.03,50.53 45.3,44.8 45.17,44.8 44.4,44.03 v44.4,41.3
N$7  (via drill 0.2)
  Top 0.127: J1.63 v44,43.55
  Route2 0.127: TET13.1 51.23,55.12 50.2,54.1 50.2,50.79 44,44.59 v44,43.55
N$8  (via drill 0.2)
  Top 0.127: J1.62 v43.6,41.3
  Route15 0.127: TET13.0 49.89,50.49 43.6,44.2 v43.6,41.3
N$9  (via drill 0.2)
  Top 0.127: J1.61 v43.2,43.55
  Route2 0.127: TET14.3 48.26,49.6 43.2,44.55 v43.2,43.55
N$10  (via drill 0.2)
  Top 0.127: J1.60 v42.8,41.3
  Route15 0.127: TET14.2 47.06,49.18 42.8,44.92 v42.8,41.3
N$11  (via drill 0.2)
  Top 0.127: J1.59 v42.4,43.55
  Route2 0.127: TET14.1 46.88,57.08 46.3,56.5 46.3,48.8 42.4,44.9 v42.4,43.55
N$12  (via drill 0.2)
  Top 0.127: J1.58 v42,41.3
  Route15 0.127: TET14.0 45.73,49 42,45.27 v42,41.3
N$13  (via drill 0.2)
  Top 0.127: J1.57 v41.6,43.55
  Route2 0.127: TET15.3 43.55,47.02 41.6,45.08 v41.6,43.55
N$14  (via drill 0.2)
  Top 0.127: J1.56 v41.2,41.3
  Route15 0.127: v41.2,41.3 41.18,41.5 41.18,45.59 42.6,47.01 TET15.2
N$15  (via drill 0.2)
  Top 0.127: J1.55 v40.8,43.55
  Route2 0.127: TET15.1 42.06,58.06 41.9,57.9 41.9,47.35 40.8,46.26 v40.8,43.55
N$16  (via drill 0.2)
  Top 0.127: J1.54 v40.4,41.3
  Route15 0.127: TET15.0 41.19,46.69 40.4,45.9 v40.4,41.3
N$17  (via drill 0.2)
  Top 0.127: J1.53 v40,43.55
  Route2 0.127: TET0.0 38.81,46.59 40,45.4 v40,43.55
N$18  (via drill 0.2)
  Top 0.127: J1.52 v39.6,41.3
  Route15 0.127: TET0.1 37.94,57.86 38.1,57.7 38.1,46.6 39.6,45.1 v39.6,41.3
N$19  (via drill 0.2)
  Top 0.127: J1.51 v39.2,43.55
  Route2 0.127: TET0.2 37.4,47.01 39.2,45.2 v39.2,43.55
N$20  (via drill 0.2)
  Top 0.127: J1.50 v38.8,41.3
  Route15 0.127: TET0.3 36.45,47.02 38.8,44.68 v38.8,41.3
N$21  (via drill 0.2)
  Top 0.127: J1.49 v38.4,43.55
  Route2 0.127: TET1.0 34.27,48.23 38.4,44.1 v38.4,43.55
N$22  (via drill 0.2)
  Top 0.127: J1.48 v38,41.3
  Route15 0.127: TET1.1 33.12,56.98 33.7,56.4 33.7,48.7 38,44.4 v38,41.3
N$23  (via drill 0.2)
  Top 0.127: J1.47 v37.6,43.55
  Route2 0.127: TET1.2 32.94,48.66 37.6,44 v37.6,43.55
N$24  (via drill 0.2)
  Top 0.127: J1.46 v37.2,41.3
  Route15 0.127: TET1.3 31.74,49.6 37.2,44.15 v37.2,41.3
N$25  (via drill 0.2)
  Top 0.127: J1.45 v36.8,43.55
  Route2 0.127: TET2.0 30.11,50.39 36.8,43.7 v36.8,43.55
N$26  (via drill 0.2)
  Top 0.127: J1.44 v36.4,41.3
  Route15 0.127: TET2.1 28.77,55.12 29.8,54.1 29.8,50.79 36.4,44.19 v36.4,41.3
N$27  (via drill 0.2)
  Top 0.127: J1.43 v36,43.55
  Route2 0.127: TET2.2 28.96,50.94 36,43.9 v36,43.55
N$28  (via drill 0.2)
  Top 0.127: J1.42 v35.6,41.3
  Route15 0.127: TET2.3 27.6,53.4 28.6,52.4 28.6,50.9 35.64,43.86 35.64,43.41 35.6,43.37 v35.6,41.3
N$29  (via drill 0.2)
  Top 0.127: v35.1,43.55 35.2,43.45 J1.41
  Route2 0.127: TET17.0 34.81,44.01 35.1,43.71 v35.1,43.55
N$30  (via drill 0.2)
  Top 0.127: J1.40 v34.8,41.3
  Route15 0.127: 34.8,41.4 v34.8,41.3 33.7,42.4 33.7,43.7 25.5,51.9 TET17.1
N$31  (via drill 0.2)
  Top 0.127: J1.39 34.4,43.55 v34.3,43.55
  Route2 0.127: TET17.2 32.76,43.56 32.76,43.55 v34.3,43.55
N$32  (via drill 0.2)
  Top 0.127: J1.38 v34,41.3
  Route15 0.127: v34,41.3 33.68,41.3 TET17.3
N$33  (via drill 0.2)
  Top 0.127: J1.5 v45.2,40.7
  Route2 0.127: v45.2,40.7 45.14,40.64 45.14,35.37 51.73,28.79 TET11.0
N$34  (via drill 0.2)
  Top 0.127: J1.4 45.6,40.5 v45.8,40.7
  Route15 0.127: TET11.1 54.4,27.8 53.68,27.8 45.8,35.68 v45.8,40.7
N$35  (via drill 0.2)
  Top 0.127: J1.3 46,40.42 46.28,40.7 v46.4,40.7
  Route2 0.127: v46.4,40.7 46.4,40.2 45.8,39.6 45.8,36.72 52.59,29.92 TET11.2
N$36  (via drill 0.2)
  Top 0.127: J1.2 v46.4,38.45
  Route15 0.127: TET11.3 55.13,30.8 52,30.8 46.4,36.4 v46.4,38.45
N$37  (via drill 0.2)
  Top 0.127: J2.33 84,40.41 83.7,40.71 v83.7,40.8
  Route2 0.127: v83.7,40.8 83.7,39.9 73.93,30.13 TET19.3
N$38  (via drill 0.2)
  Top 0.127: J2.32 84.4,40.5 v84.2,40.7
  Route15 0.127: v84.2,40.7 84.6,40.3 84.6,37.31 77.21,29.92 TET19.2
N$39  (via drill 0.2)
  Top 0.127: J2.31 v84.8,40.7
  Route2 0.127: v84.8,40.7 84.8,38.6 76.2,30.5 76.2,29.8 75.02,28.62 TET19.1 | v84.8,40.7
N$40  (via drill 0.2)
  Top 0.127: J2.30 v85.2,38.45
  Route15 0.127: TET19.0 78.27,28.79 85.2,35.71 v85.2,38.45
N$41  (via drill 0.2)
  Top 0.127: J2.29 v85.6,40.7
  Route2 0.127: v85.6,40.7 85.6,37.2 77.1,28.7 TET20.3
N$42  (via drill 0.2)
  Top 0.127: J2.28 v86,38.45
  Route15 0.127: v86,38.45 86,35.7 78.49,28.19 TET20.2
N$43  (via drill 0.2)
  Top 0.127: J2.27 v86.4,40.7
  Route2 0.127: v86.4,40.7 86.4,36.5 79.4,29.5 79.4,26.4 78.25,25.25 TET20.1
N$44  (via drill 0.2)
  Top 0.127: J2.26 v86.8,38.45
  Route15 0.127: v86.8,38.45 86.8,35.4 79.6,28.2 TET20.0
N$45  (via drill 0.2)
  Top 0.127: J2.25 v87.2,40.7
  Route2 0.127: TET21.3 81.15,29.37 87.02,35.23 87.02,38 87.2,38.18 v87.2,40.7
N$46  (via drill 0.2)
  Top 0.127: J2.24 v87.6,38.45
  Route15 0.127: v87.6,38.45 87.6,38.55 87.2,38.15 87.2,34.6 82.38,29.79 TET21.2
N$47  (via drill 0.2)
  Top 0.127: J2.23 v88,40.7
  Route2 0.127: v88,40.7 88,38.3 87.4,37.7 87.4,33.78 83.3,29.68 83.3,24.3 83.1,24.1 83.1,23.7 82.51,23.11 TET21.1
N$48  (via drill 0.2)
  Top 0.127: J2.22 v88.4,38.45
  Route15 0.127: TET21.0 83.68,29.35 87.63,33.3 87.63,37.7 88.38,38.45 v88.4,38.45
N$49  (via drill 0.2)
  Top 0.127: J2.21 v88.8,40.7
  Route2 0.127: v88.8,40.7 88.8,38.35 89.37,37.78 89.37,36.58 88.19,35.41 88.15,35.36 88.1,35.31 88.1,32.6 85.8,30.3 TET22.3
N$50  (via drill 0.2)
  Top 0.127: J2.20 v89.2,38.45
  Route15 0.127: TET22.2 86.79,30.3 88.62,32.13 88.62,35.22 89.6,36.2 89.6,37.8 89.2,38.2 v89.2,38.45
N$51  (via drill 0.2)
  Top 0.127: J2.19 v89.6,40.7
  Route2 0.127: TET22.1 87.5,21.41 87.5,23.4 88.95,24.85 88.95,35.05 89.8,35.9 89.8,37.9 89.6,38.1 v89.6,40.7
N$52  (via drill 0.2)
  Top 0.127: J2.18 v90,38.45
  Route15 0.127: v90,38.45 90,35.65 89.3,34.95 89.3,31.7 88.19,30.59 TET22.0
N$53  (via drill 0.2)
  Top 0.127: J2.17 v90.4,40.7
  Route2 0.127: TET29.0 90.55,23.59 90.55,33 90.55,35.5 90.2,35.85 90.2,37.9 90.4,38.1 v90.4,40.7
N$54  (via drill 0.2)
  Top 0.127: J2.16 v90.8,38.45
  Route15 0.127: TET29.1 92.6,21.31 92.6,31.52 90.91,33.21 90.91,35.55 90.4,36.06 90.4,37.9 90.8,38.3 v90.8,38.45
N$55  (via drill 0.2)
  Top 0.127: J2.15 v91.2,40.7
  Route2 0.127: v91.2,40.7 91.2,38.35 90.63,37.78 90.63,36.35 91.23,35.75 91.23,24.51 TET29.2
N$56  (via drill 0.2)
  Top 0.127: J2.14 v91.6,38.45
  Route15 0.127: v91.6,38.45 91.6,38.4 91.67,38.4 92.37,37.7 92.37,32.83 94.2,31 TET29.3
N$57  (via drill 0.2)
  Top 0.127: J2.13 v92,40.7
  Route2 0.127: TET28.0 92.6,27.12 92.6,37.77 92,38.37 v92,40.7
N$58  (via drill 0.2)
  Top 0.127: J2.12 v92.4,38.45
  Route15 0.127: TET28.1 96.9,23.13 96.9,29.48 92.85,33.53 92.85,37.7 92.4,38.15 v92.4,38.45
N$59  (via drill 0.2)
  Top 0.127: J2.11 v92.8,40.7
  Route2 0.127: v92.8,40.7 92.8,38.3 93.05,38.05 93.05,28.54 TET28.2
N$60  (via drill 0.2)
  Top 0.127: J2.10 v93.2,38.45
  Route15 0.127: TET28.3 98.85,29.15 93.5,34.5 93.5,38.15 v93.2,38.45
N$61  (via drill 0.2)
  Top 0.127: J2.9 v93.6,40.7
  Route2 0.127: v93.6,40.7 93.6,32.4 TET27.0
N$62  (via drill 0.2)
  Top 0.127: J2.8 v94,38.45
  Route15 0.127: v94,38.45 94,34.9 100.91,27.98 100.91,25.91 TET27.1
N$63  (via drill 0.2)
  Top 0.127: J2.7 v94.4,40.7
  Route2 0.127: v94.4,40.7 94.4,33.59 TET27.2
N$64  (via drill 0.2)
  Top 0.127: J2.6 v94.8,38.45
  Route15 0.127: TET27.3 102.9,27.2 94.8,35.3 v94.8,38.45
N$65  (via drill 0.2)
  Top 0.127: J2.69 v96.4,43.65
  Route2 0.127: TET30.3 98.82,43.8 96.55,43.8 v96.4,43.65
N$66  (via drill 0.2)
  Top 0.127: J2.67 v95.6,43.55
  Route2 0.127: TET30.1 104.5,51.9 103.5,50.9 102.95,50.9 v95.6,43.55
N$67  (via drill 0.2)